# EAGLE board SparkFun_IoT_RedBoard-ESP32_v01-Panel (EAGLE 9.6.2), part 1 of 3
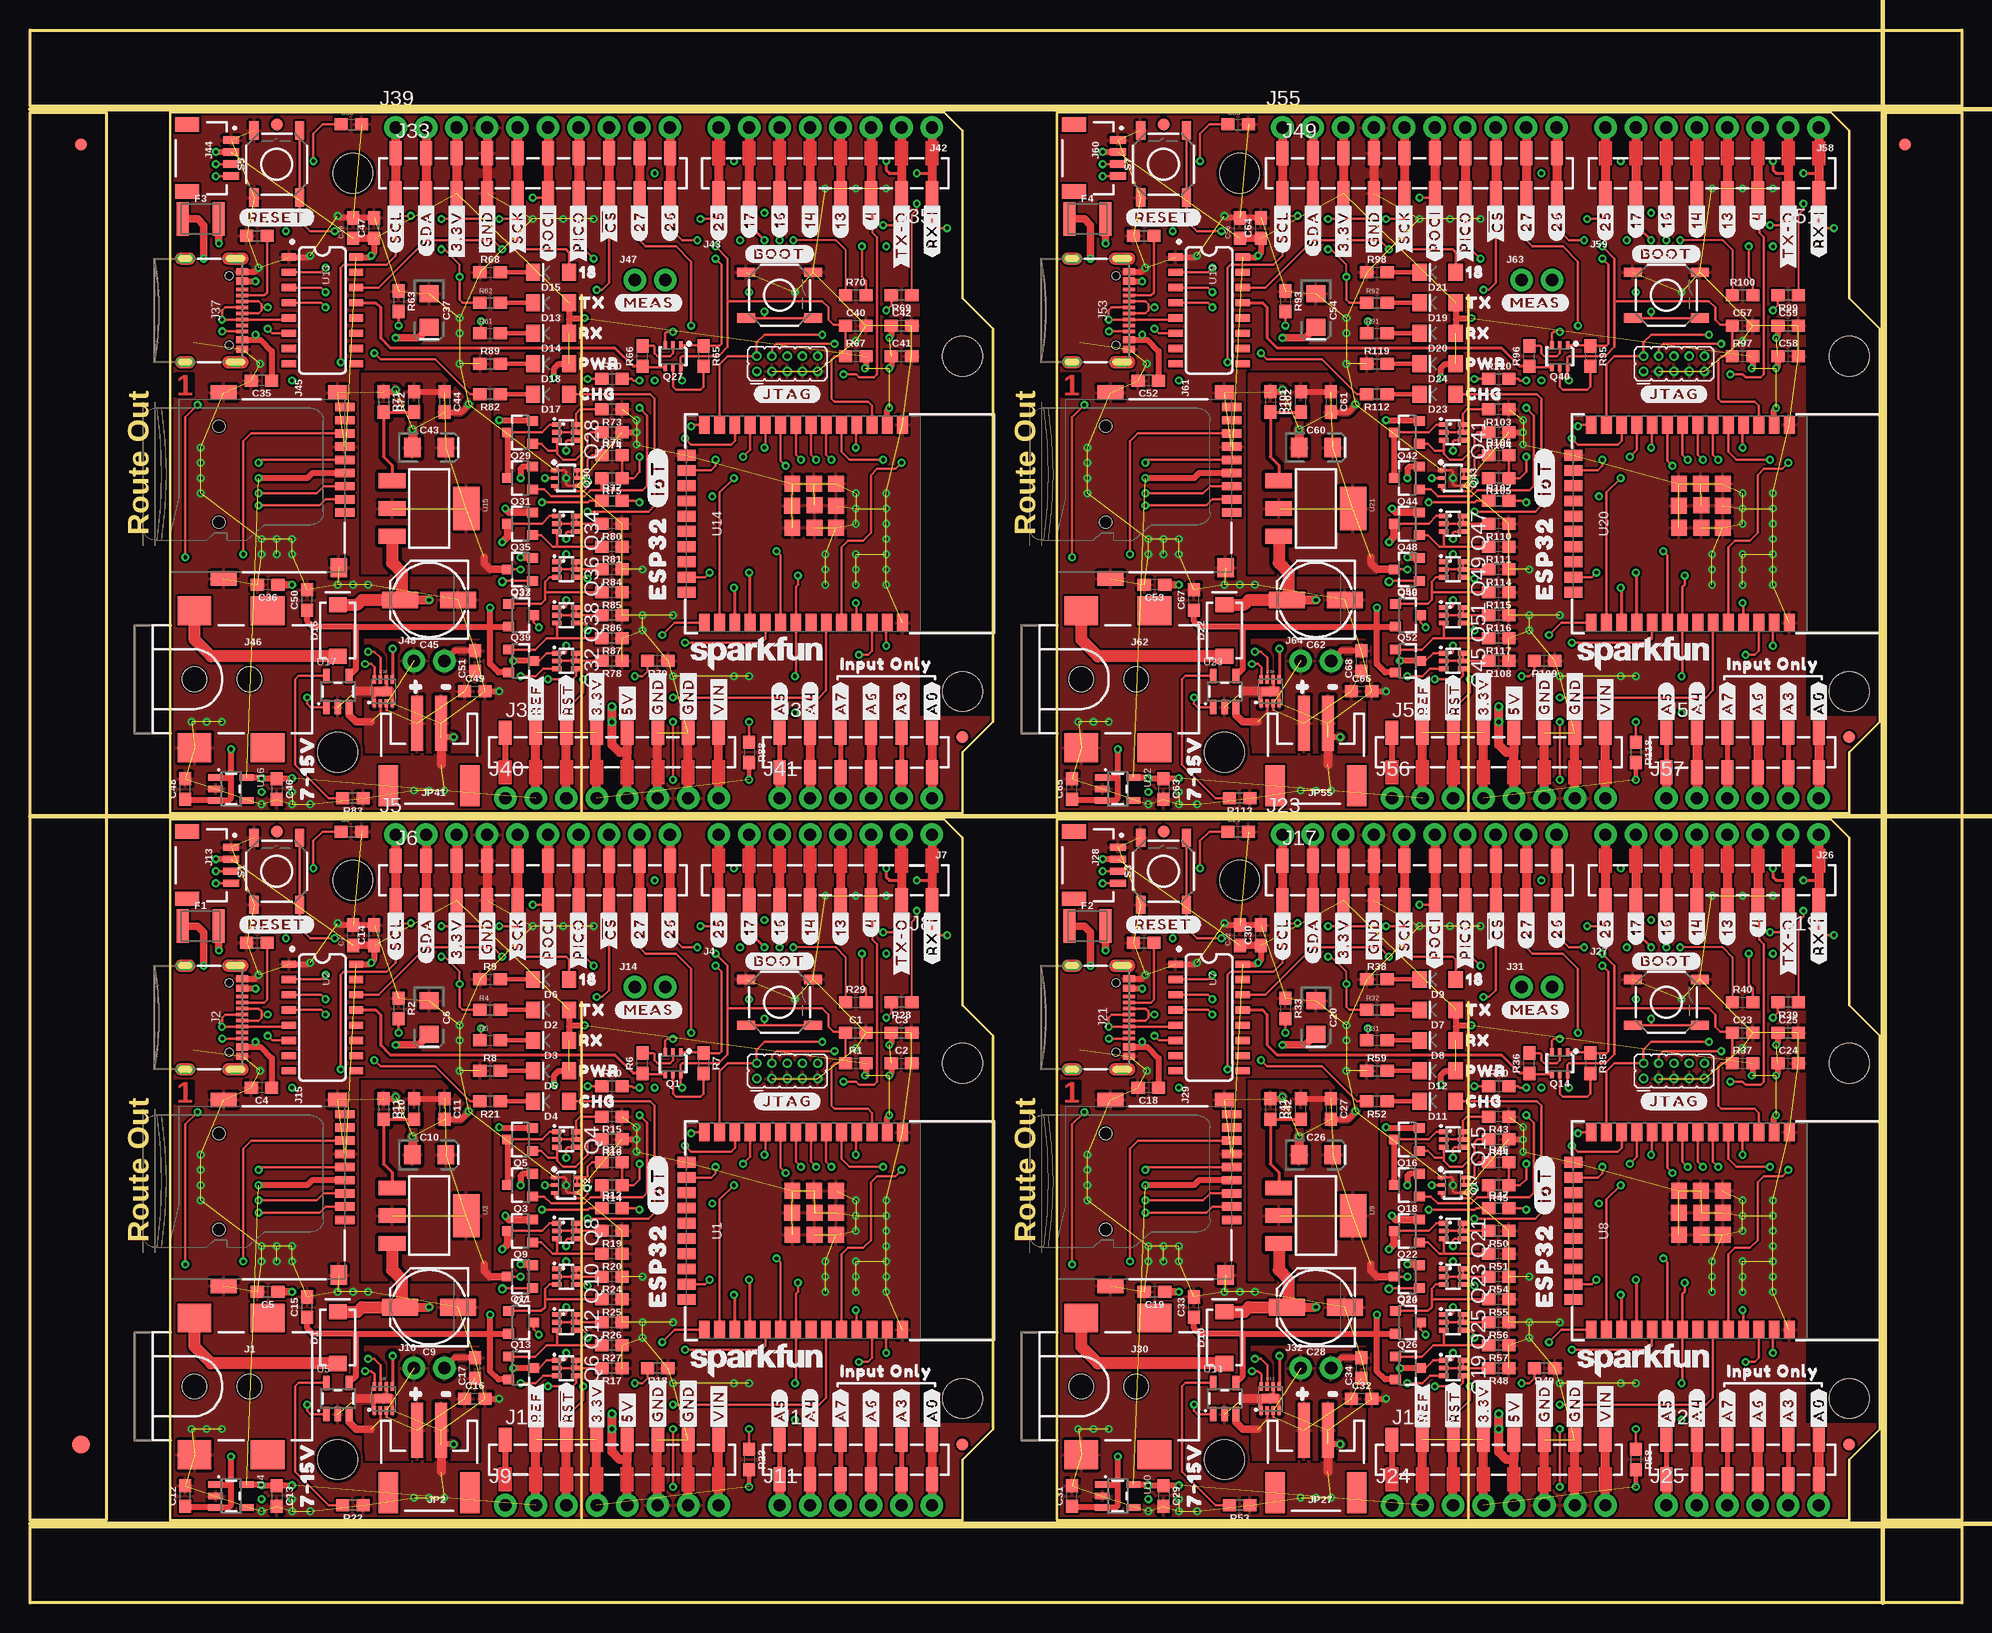
[diagram p0: board, top side]
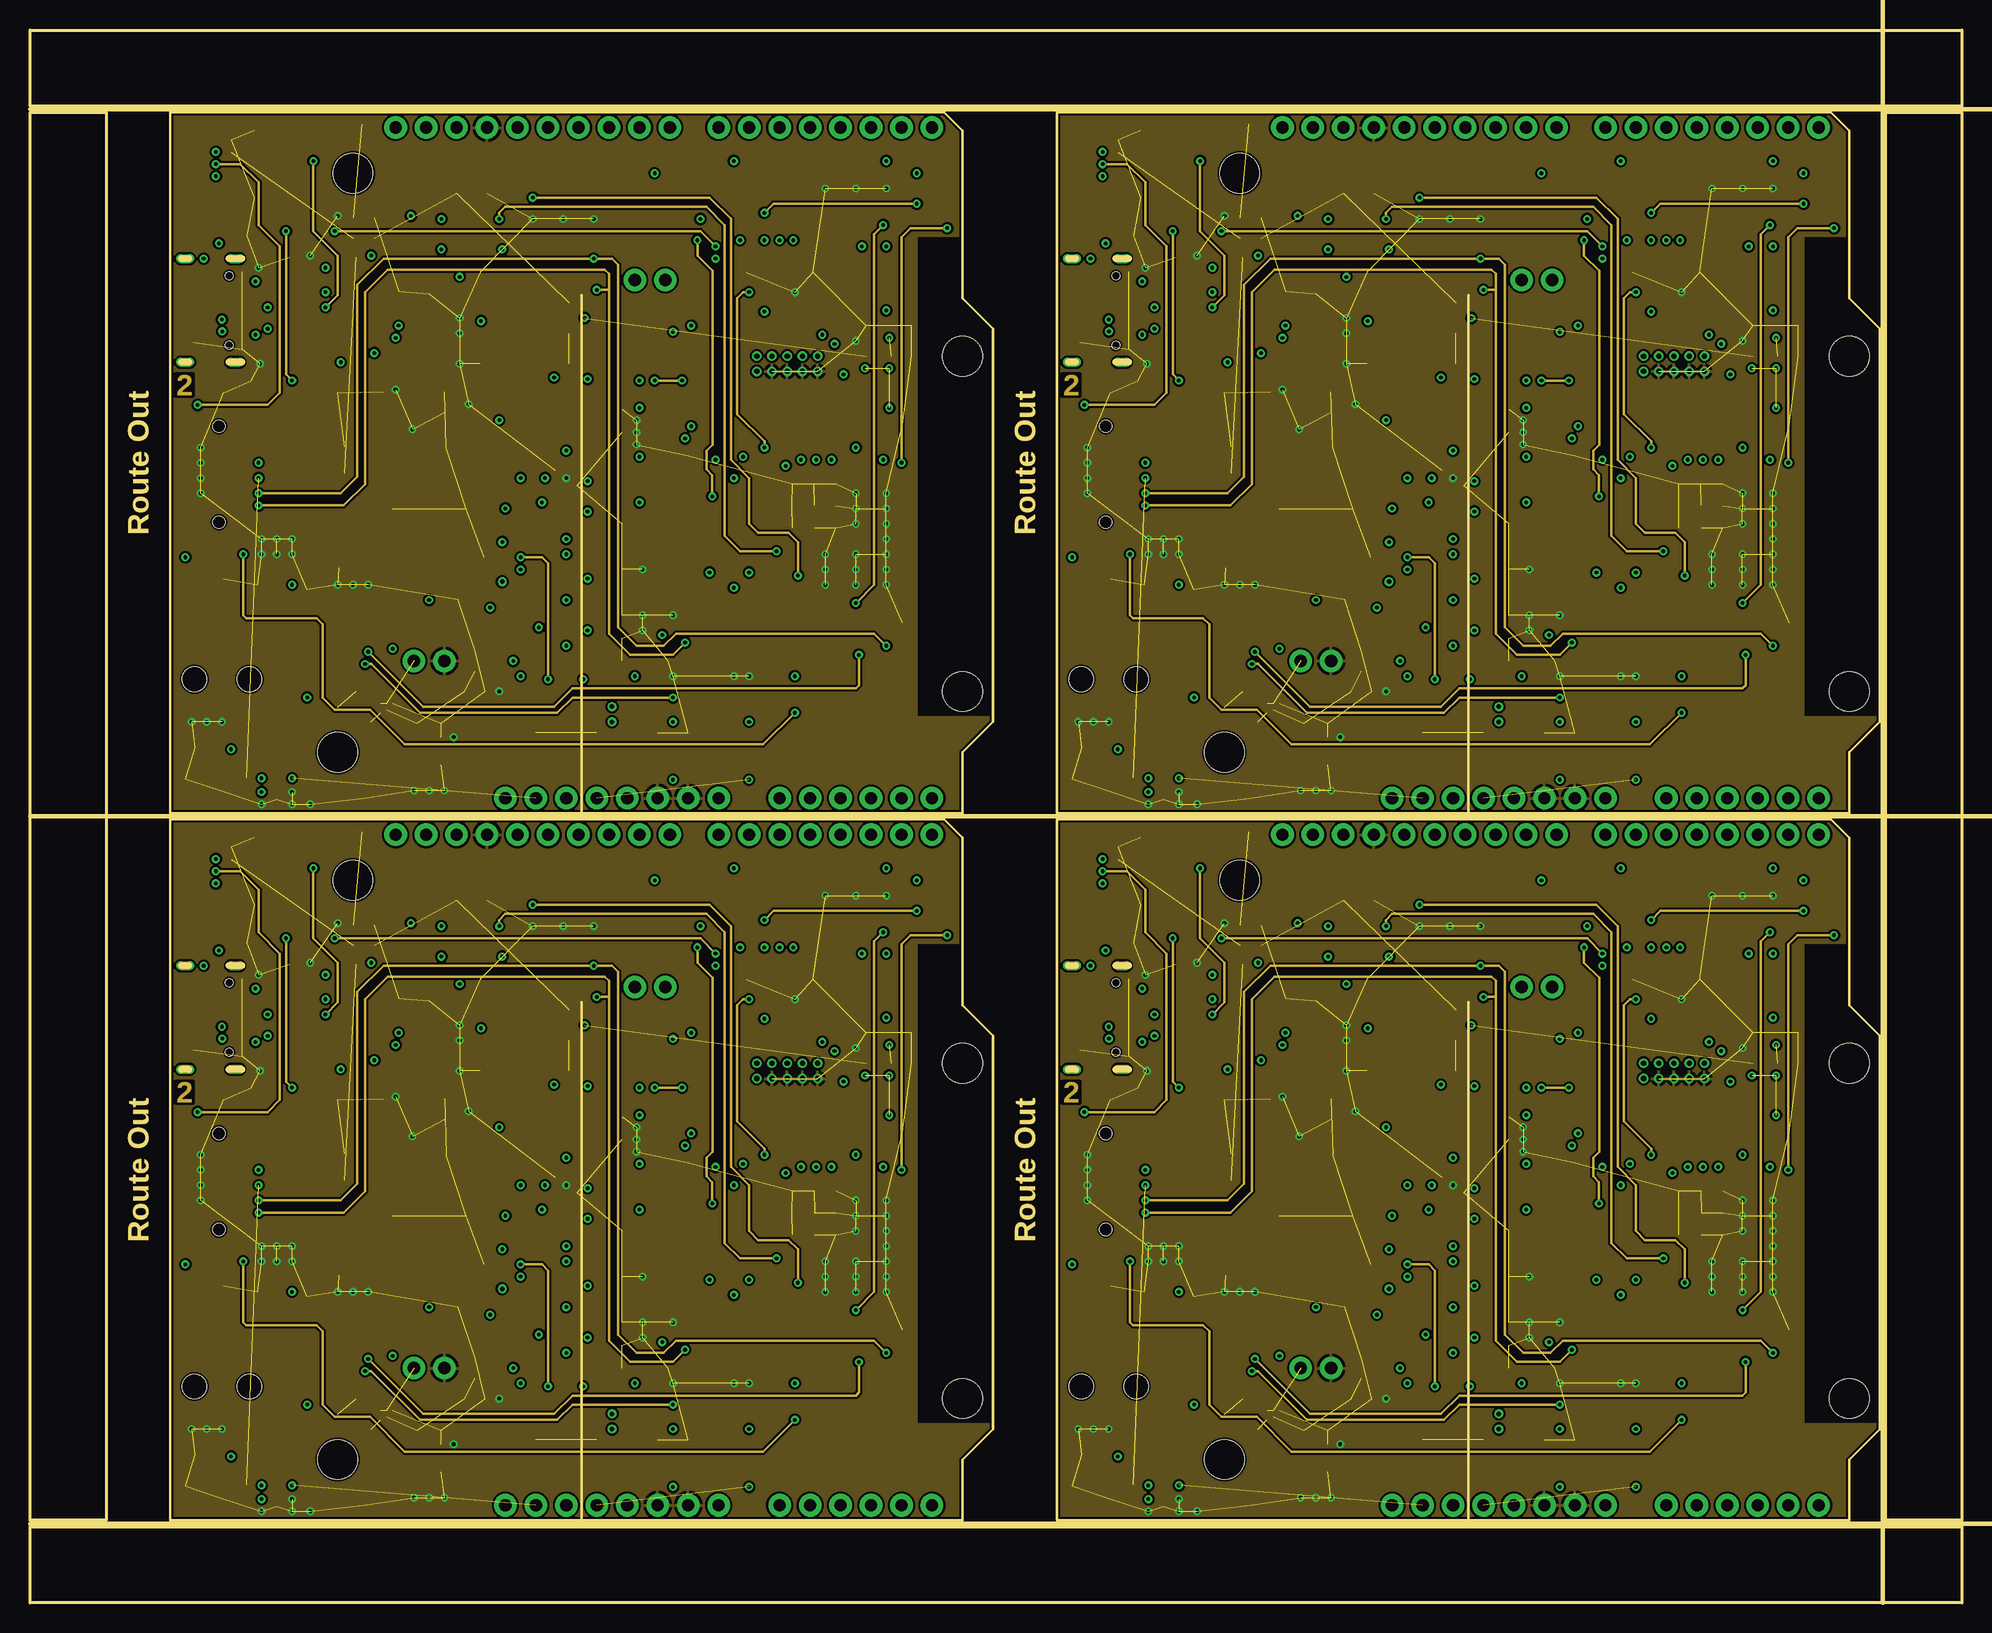
[diagram p1: board, inner layer Route2]
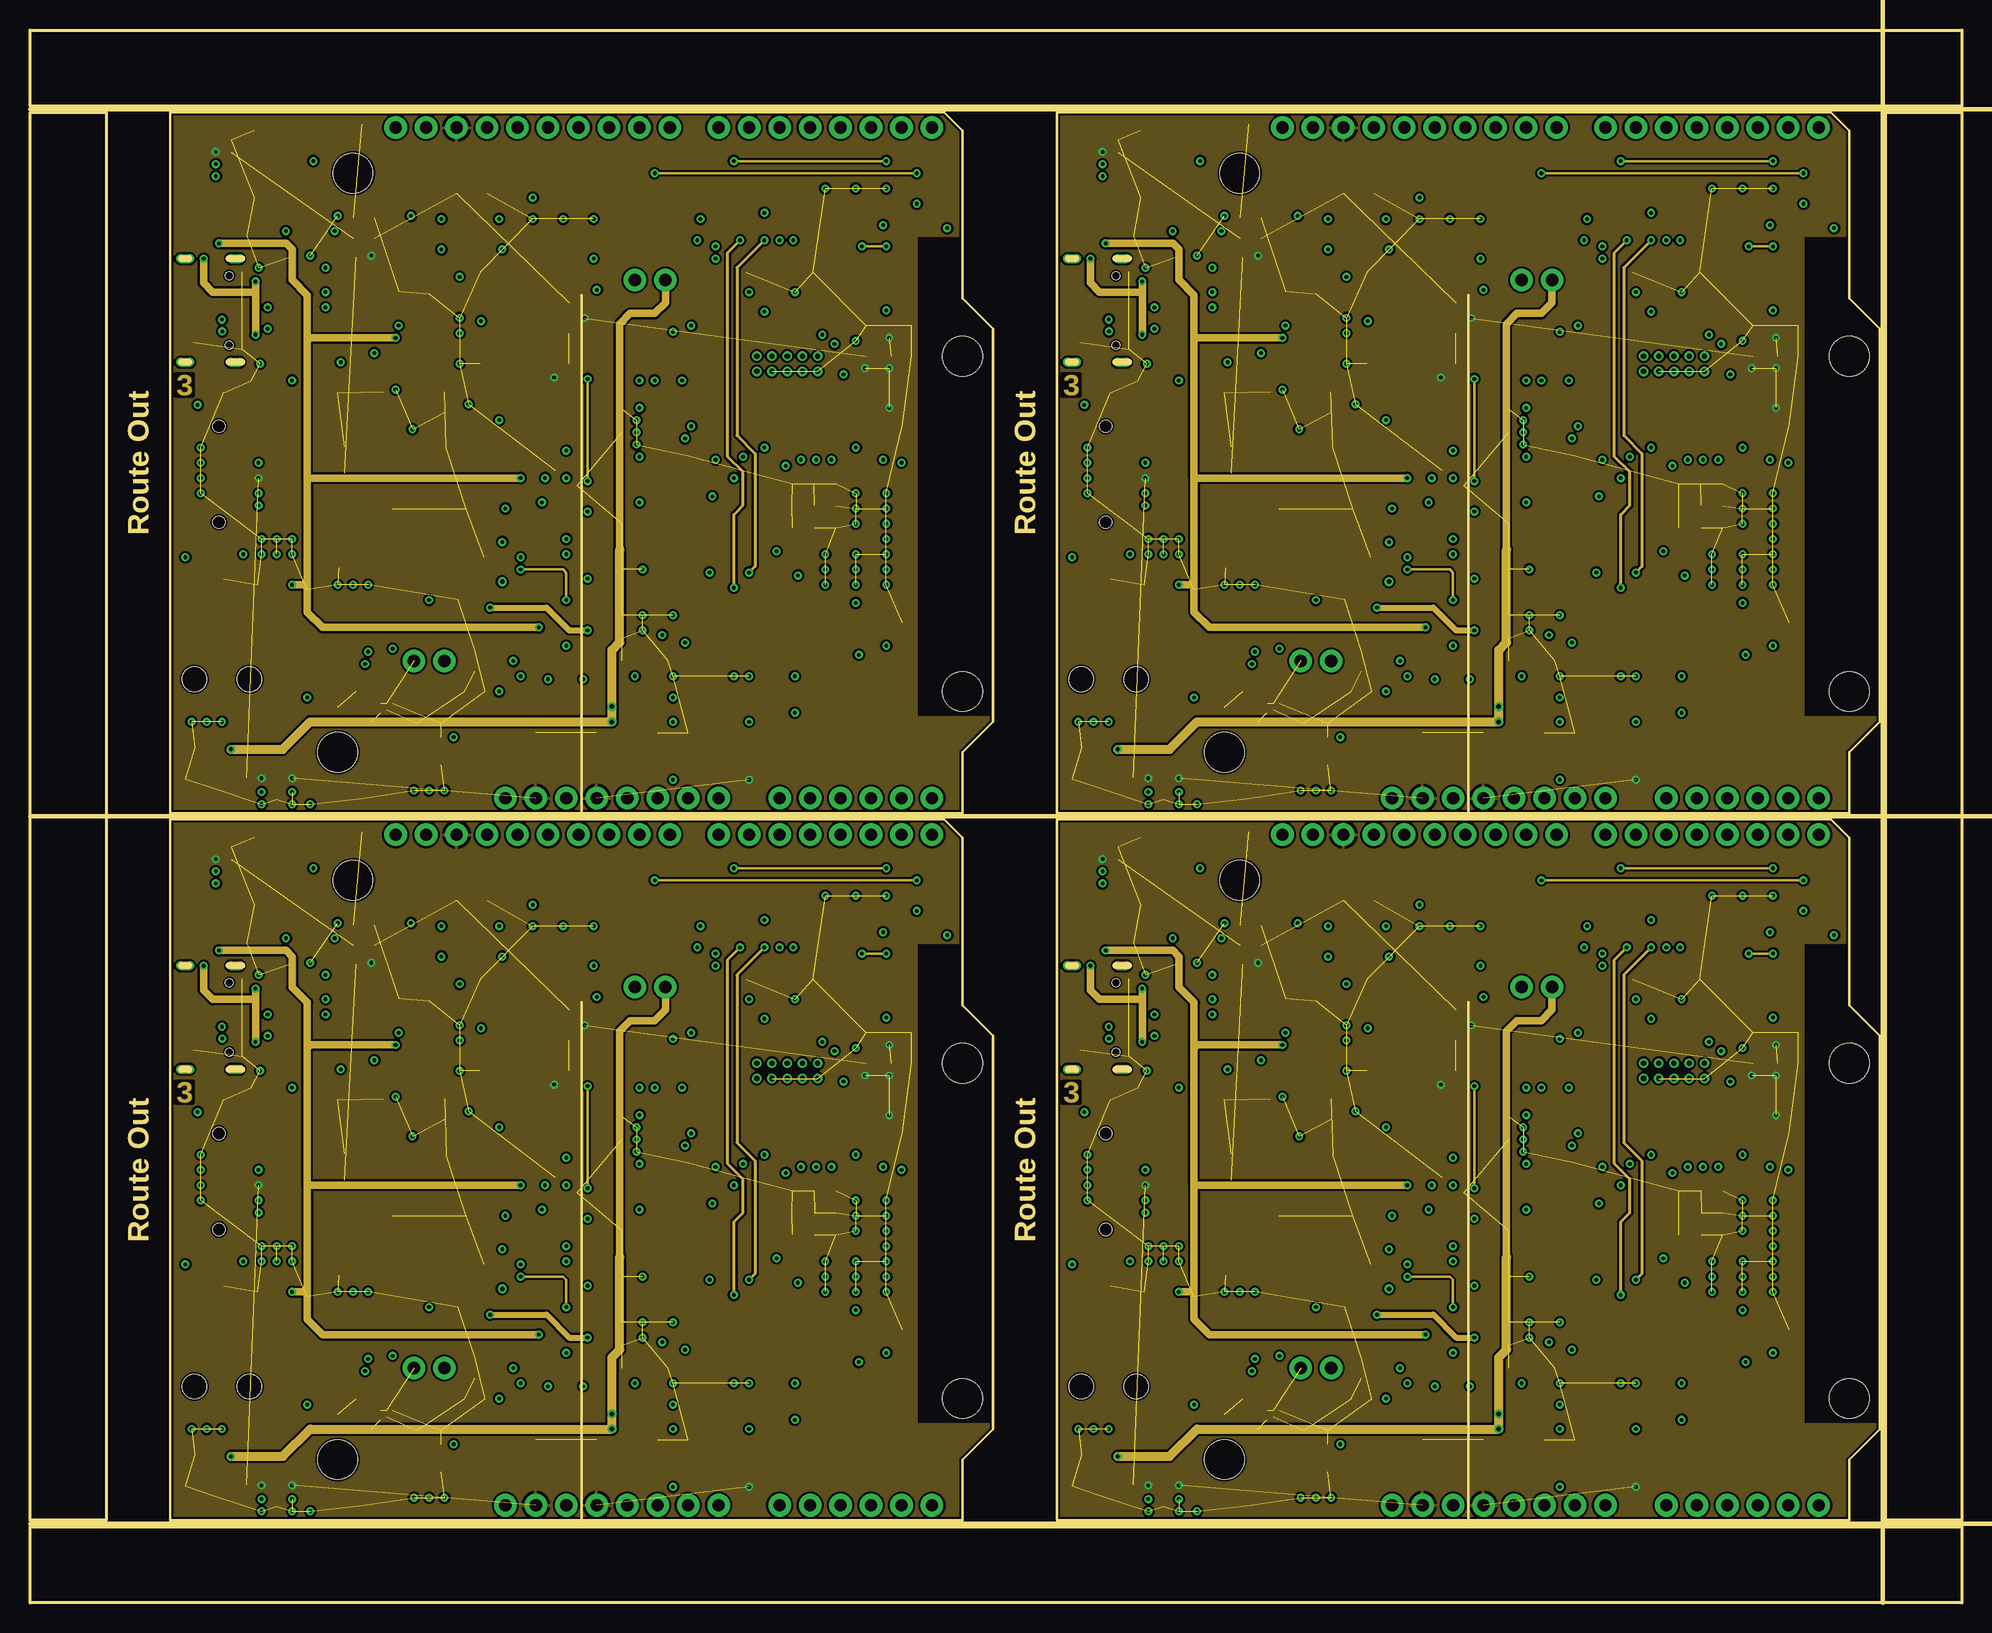
[diagram p2: board, inner layer Route15]
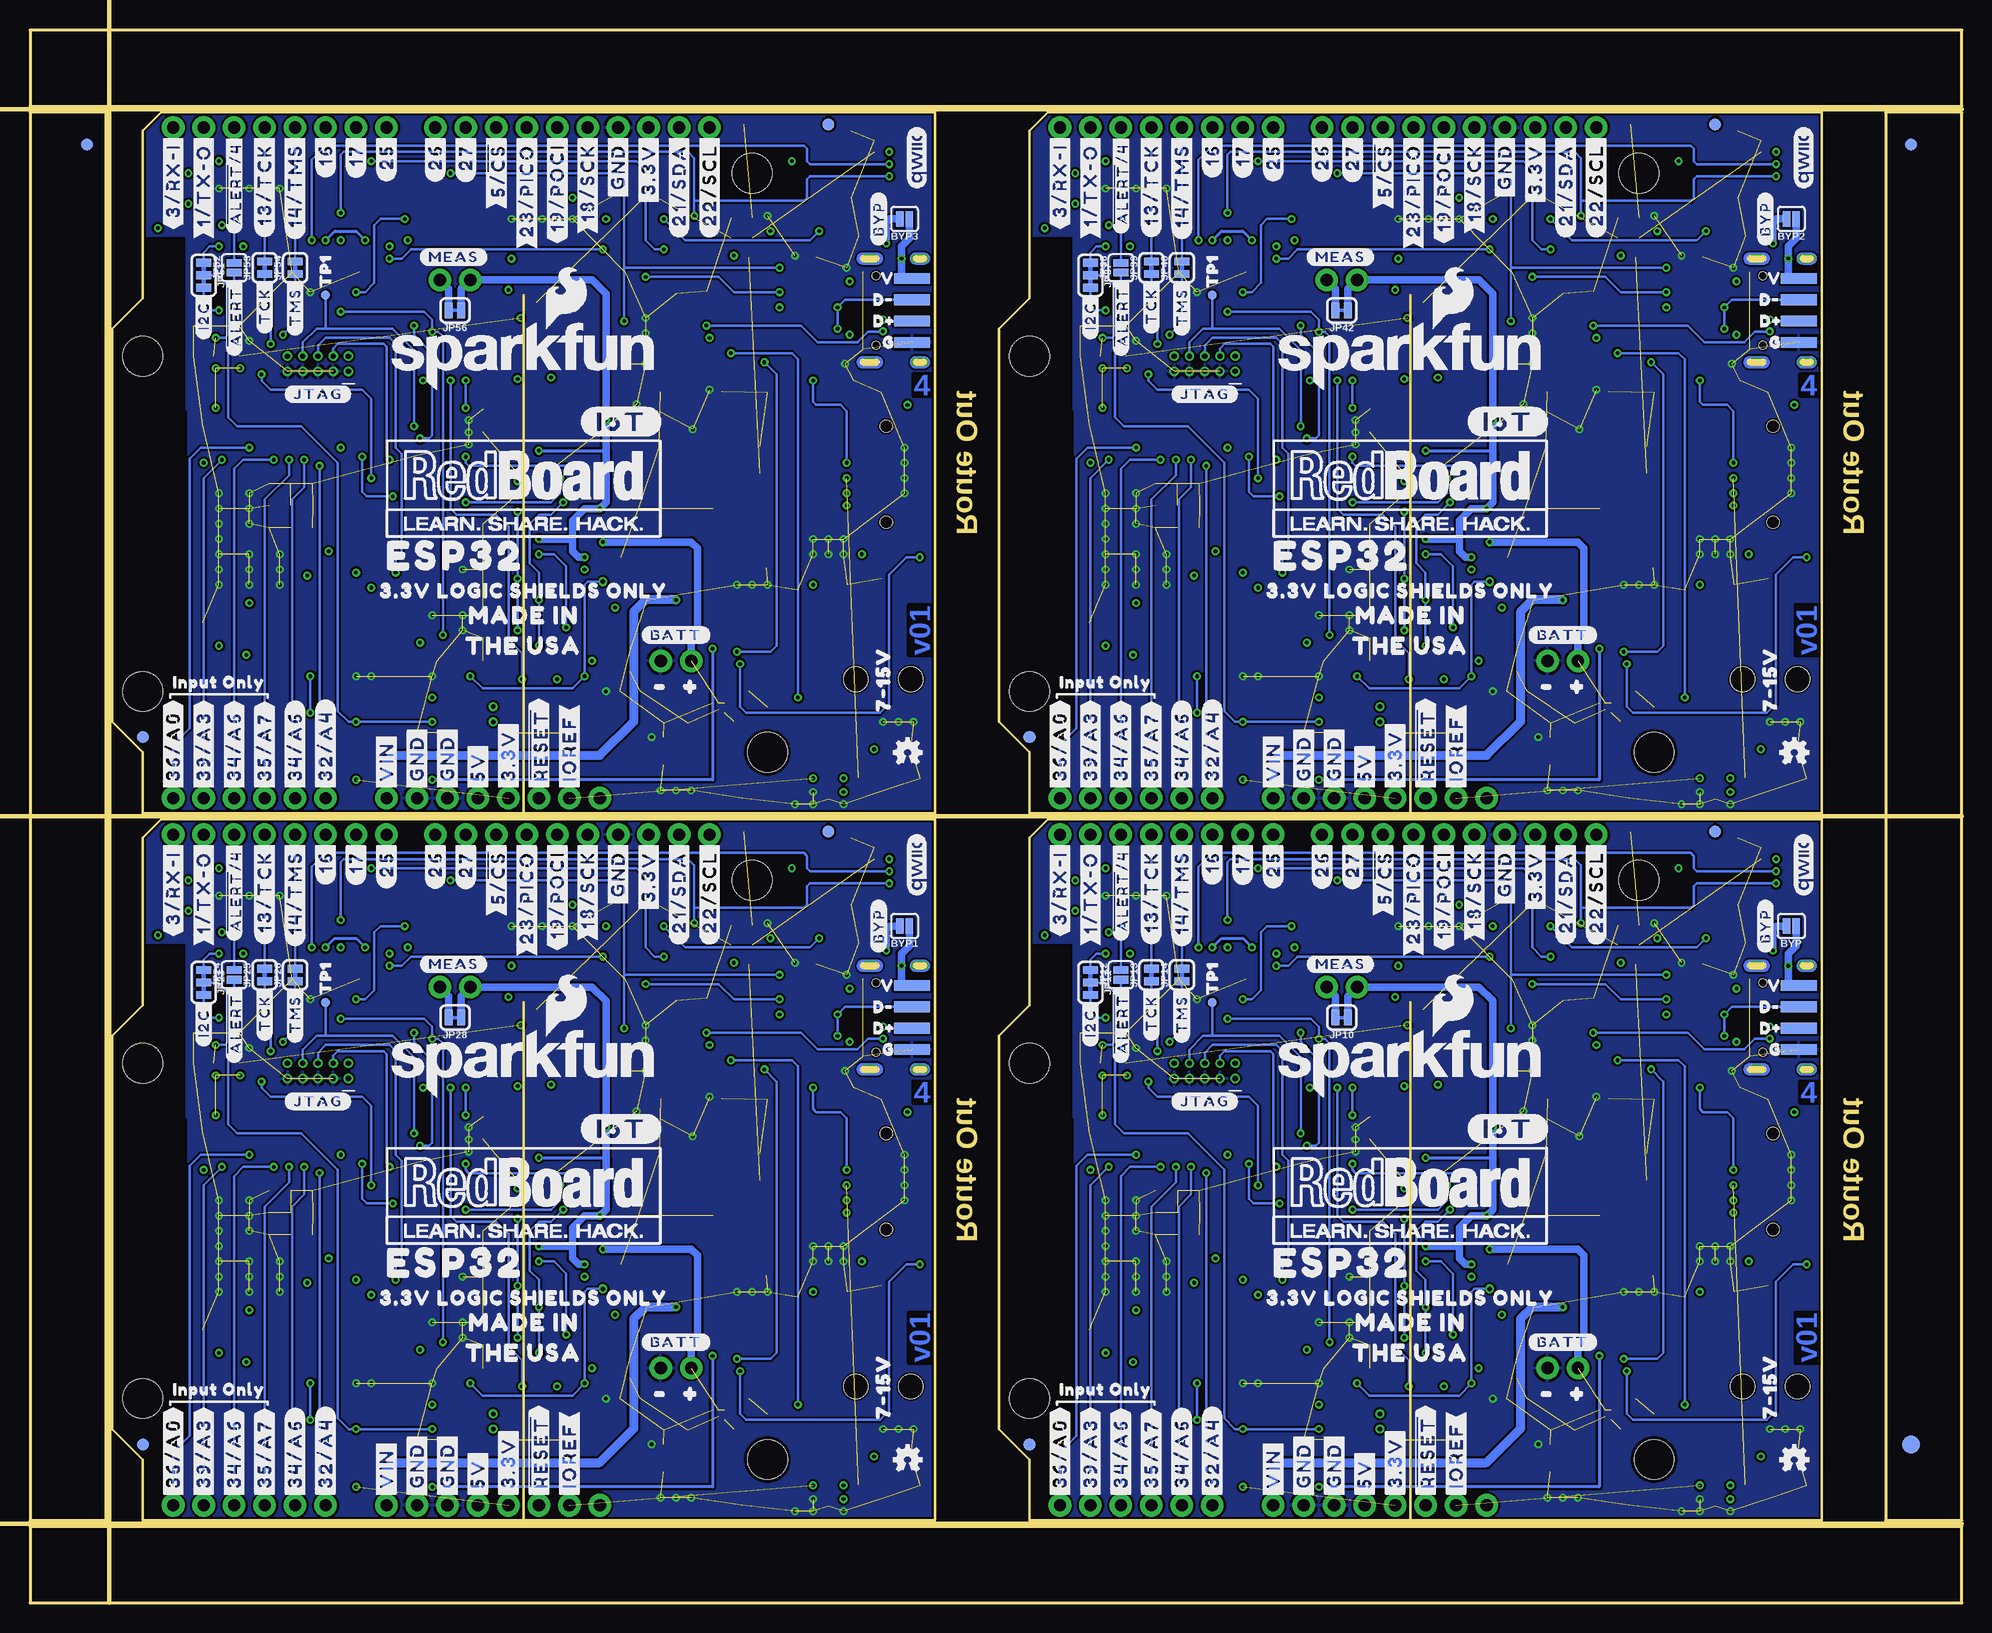
[diagram p3: board, bottom side, seen from below]

Size 161.04 x 131.06 mm. Coordinates in mm from the lower left corner, seen from the top.
Outline: 11.68,65.28 76.2,65.28 77.72,63.75 77.72,49.78 80.26,47.24 80.26,14.48 77.72,11.94 77.72,6.86 11.68,6.86 11.68,65.28
Outline: 85.6,65.28 150.11,65.28 151.64,63.75 151.64,49.78 154.18,47.24 154.18,14.48 151.64,11.94 151.64,6.86 85.6,6.86 85.6,65.28
Outline: 11.68,124.21 76.2,124.21 77.72,122.68 77.72,108.71 80.26,106.17 80.26,73.41 77.72,70.87 77.72,65.79 11.68,65.79 11.68,124.21
Outline: 85.6,124.21 150.11,124.21 151.64,122.68 151.64,108.71 154.18,106.17 154.18,73.41 151.64,70.87 151.64,65.79 85.6,65.79 85.6,124.21
Outline: 0,6.35 161.04,6.35 161.04,0 0,0 0,6.35
Outline: 154.69,124.21 161.04,124.21 161.04,6.86 154.69,6.86 154.69,124.21
Outline: 0,131.06 161.04,131.06 161.04,124.71 0,124.71 0,131.06
Outline: 0,124.21 6.35,124.21 6.35,6.86 0,6.86 0,124.21
Copper layers (1+2*15+16): Top 0.035559375mm / dielectric 0.47751875mm / Route2 0.035559375mm / dielectric 0.47751875mm / Route15 0.035559375mm / dielectric 0.47751875mm / Bottom 0.035559375mm
Design rules "SparkFun_IoT_RedBoard-ESP32_v01": minimum track width 7mil, minimum drill 12mil, track to track 7mil, track to pad 7mil, pad to pad 7mil, via to via 7mil, smd to smd 7mil, copper to edge 7mil, drill to drill 7mil, minimum pad ring 7mil, minimum via ring 7mil, stop-mask expansion 3mil, vias tented up to drill 25mil, thermal gap 10mil
tRestrict: area 74.2,15 to 80.3,54.9; area 148.1,15 to 154.2,54.9; area 74.2,73.9 to 80.3,113.8; area 148.1,73.9 to 154.2,113.8
bRestrict: area 74.2,21.8 to 80.3,40.1; area 74.2,15 to 80.3,54.9; area 148.1,21.8 to 154.2,40.1; area 148.1,15 to 154.2,54.9; area 74.2,80.8 to 80.3,99.1; area 74.2,73.9 to 80.3,113.8; area 148.1,80.8 to 154.2,99.1; area 148.1,73.9 to 154.2,113.8
vRestrict: area 12.3,29.2 to 13.7,37.5; area 17.4,30 to 19,37.5; area 59.6,17.7 to 60.2,18.2; area 62.1,17.5 to 62.6,18.4; area 23,36.2 to 24.4,38.5; area 11.9,19.8 to 21.1,31.9; area 86.2,29.2 to 87.6,37.5; area 91.3,30 to 93,37.5; area 133.5,17.7 to 134.1,18.2; area 136,17.5 to 136.5,18.4; area 96.9,36.2 to 98.3,38.5; area 85.9,19.8 to 95,31.9; 12 more areas
Milling: 12 lines

## Footprints (pad centres in the part's own frame; a part is rotated, then mirrored left to right if it is on the bottom)
SMT-JUMPER_2_NO_SILK = smd 0.635 x 1.27: 1 -0.406,0; 2 0.406,0
0603 = smd 1.1 x 1: 1 -0.85,0; 2 0.85,0
EIA3216 = smd 1.4 x 1.6: + 1.4,0; - -1.4,0
PANASONIC_D = smd 3 x 1.4: + 2.4,0; - -2.4,0
SMA-DIODE = smd 1.27 x 1.47: A -2.15,0; C 2.15,0
LED-1206-HIDDENSILK = smd 1.2 x 1.4: A -1.5,0; C 1.5,0
FIDUCIAL-1X2 = smd 1 x 1: 1 0,0
FIDUCIAL-1.5X3 = smd 1.5 x 1.5: 1 0,0
1210 = smd 1 x 2.8: 1 -1.5,0; 2 1.5,0
POWER_JACK_SMD = smd 2.8 x 2.4: GND 0,-5.7; P$4 6.1,-5.7; VIN0 0,5.7; VIN1 6.1,5.7 | hole 2.032: 0,0; 4.572,0
USB-C-16P-2LAYER-PADS = smd 0.3 x 1: A5 -1.25,-0.34; A6 -0.25,-0.34; A7 0.25,-0.34; A8 1.25,-0.34; B5 1.75,-0.34; B6 0.75,-0.34; B7 -0.75,-0.34; B8 -1.75,-0.34 | smd 0.6 x 1: GND -3.225,-0.34; GND2 3.225,-0.34; VBUS1 -2.45,-0.34; VBUS2 2.45,-0.34 | drill 0.4 pad 0.6 long: SHLD1 -4.318,-0.915; SHLD2 4.318,-0.915; SHLD3 -4.318,-5.095; SHLD4 4.318,-5.095 | hole 0.65: -2.89,-1.445; 2.89,-1.445
USB-SOLDER-PADS = smd 3 x 0.9: D+ 0,-0.889; D- 0,0.889; GND 0,-2.667; VBUS 0,2.667
2X5_PTH_SILK_.05 = drill 0.432: 1 0,0; 2 0,1.27; 3 1.27,0; 4 1.27,1.27; 5 2.54,0; 6 2.54,1.27; 7 3.81,0; 8 3.81,1.27; 9 5.08,0; 10 5.08,1.27
1X10_NO_SILK = drill 1.016 pad 1.88: 1 0,0; 2 2.54,0; 3 5.08,0; 4 7.62,0; 5 10.16,0; 6 12.7,0; 7 15.24,0; 8 17.78,0; 9 20.32,0; 10 22.86,0
1X10_SMD_COMBINED = smd 1 x 2: 1A 0,1.65; 1B 0,-1.65; 2A 2.54,1.65; 2B 2.54,-1.65; 3A 5.08,1.65; 3B 5.08,-1.65; 4A 7.62,1.65; 4B 7.62,-1.65; 5A 10.16,1.65; 5B 10.16,-1.65; 6A 12.7,1.65; 6B 12.7,-1.65; 7A 15.24,1.65; 7B 15.24,-1.65; 8A 17.78,1.65; 8B 17.78,-1.65; 9A 20.32,1.65; 9B 20.32,-1.65; 10A 22.86,1.65; 10B 22.86,-1.65
1X08_NO_SILK = drill 1.016 pad 1.88: 1 0,0; 2 2.54,0; 3 5.08,0; 4 7.62,0; 5 10.16,0; 6 12.7,0; 7 15.24,0; 8 17.78,0
1X08_SMD_COMBINED = smd 1 x 2: 1 0,1.65; 2 2.54,1.65; 3 5.08,1.65; 4 7.62,1.652; 5 10.16,1.65; 6 12.7,1.652; 7 15.24,1.65; 8 17.78,1.652
1X06_NO_SILK = drill 1.016 pad 1.88: 1 0,0; 2 2.54,0; 3 5.08,0; 4 7.62,0; 5 10.16,0; 6 12.7,0
1X06_SMD_STRAIGHT_COMBO = smd 1 x 2: 1 0,-1.65; 1-2 0,1.65; 2 2.54,1.65; 2-2 2.54,-1.65; 3 5.08,-1.65; 3-2 5.08,1.65; 4 7.62,1.65; 4-2 7.62,-1.65; 5 10.16,-1.65; 5-2 10.16,1.65; 6 12.7,1.65; 6-2 12.7,-1.65
JST04_1MM_RA = smd 0.6 x 1.35: 1 -1.5,0; 2 -0.5,0; 3 0.5,0; 4 1.5,0 | smd 1.2 x 2: NC1 2.8,-3.675; NC2 -2.8,-3.675
1X02_NO_SILK = drill 1.016 pad 1.88: 1 0,0; 2 2.54,0
MICROSD-EXTERNALPIN = smd 0.7 x 1.6: 1 2.25,10.5; 2 1.15,10.5; 3 0.05,10.5; 4 -1.05,10.5; 5 -2.15,10.5; 6 -3.25,10.5; 7 -4.35,10.5; 8 -5.45,10.5; 9 -6.55,10.5 | smd 1.2 x 1.6: 10 -7.75,9.9 | smd 1.2 x 2.2: 11 -7.75,0.4; 12 7.75,0.4 | smd 1.6 x 1.4: 13 6.85,10 | hole 1: 3.05,0; -4.95,0
JST-2-SMD = smd 1 x 4.6: 1 -1,-3.7; 2 1,-3.7 | smd 1.6 x 3.4: NC1 -3.4,1.5; NC2 3.4,1.5
STAND-OFF = hole 3.302: 0,0
SMT-JUMPER_2_NC_TRACE_SILK = smd 0.66 x 1.27: 1 -0.521,0; 2 0.521,0
SMT-JUMPER_3_2-NC_TRACE_SILK = smd 0.66 x 1.27: 1 -1.041,0; 2 0,0; 3 1.041,0
SC70-6 = smd 0.3 x 0.66: 1 -0.65,-0.92; 2 0,-0.92; 3 0.65,-0.92; 4 0.65,0.92; 5 0,0.92; 6 -0.65,0.92
SOT23-3 = smd 0.8 x 0.9: 1 -0.95,-1; 2 0.95,-1; 3 0,1.1
SOT363_PHILIPS = smd 0.4 x 0.8: 1 -0.65,-0.8; 2 0,-0.8; 3 0.65,-0.8; 4 0.65,0.8; 5 0,0.8; 6 -0.65,0.8
TACTILE_SWITCH_SMD_5.2MM = smd 1.524 x 0.762: 1 -2.794,1.905; 2 2.794,1.905; 3 -2.794,-1.905; 4 2.794,-1.905
PAD.03X.03 = smd 0.762 x 0.762: 1 0,0
ESP-WROOM-32D-NARROW = smd 0.9 x 1.5: 1 6.43,8.238; 2 5.16,8.238; 3 3.89,8.238; 4 2.62,8.238; 5 1.35,8.238; 6 0.08,8.238; 7 -1.19,8.238; 8 -2.46,8.238; 9 -3.73,8.238; 10 -5,8.238; 11 -6.27,8.238; 12 -7.54,8.238; 13 -8.81,8.238; 14 -10.08,8.238; 25 -10.08,-8.238; 26 -8.81,-8.238; 27 -7.54,-8.238; 28 -6.27,-8.238; 29 -5,-8.238; 30 -3.73,-8.238; 31 -2.46,-8.238; 32 -1.19,-8.238; 33 0.08,-8.238; 34 1.35,-8.238; 35 2.62,-8.238; 36 3.89,-8.238; 37 5.16,-8.238; 38 6.43,-8.238 | smd 1.5 x 0.9: 15 -11.57,5.715; 16 -11.57,4.445; 17 -11.57,3.175; 18 -11.57,1.905; 19 -11.57,0.635; 20 -11.57,-0.635; 21 -11.57,-1.905; 22 -11.57,-3.175; 23 -11.57,-4.445; 24 -11.57,-5.715 | smd 1.33 x 1.33: GND1 -0.912,1.531; GNDT1 -2.751,3.346; GNDT2 -2.761,1.516; GNDT3 -2.751,-0.314; GNDT4 -0.891,-0.324; GNDT5 0.909,-0.314; GNDT6 0.909,1.516; GNDT7 0.909,3.346; GNDT8 -0.921,3.346
SO016 = smd 0.6 x 1.2: 1 -4.445,-2.8; 2 -3.175,-2.8; 3 -1.905,-2.8; 4 -0.635,-2.8; 5 0.635,-2.8; 6 1.905,-2.8; 7 3.175,-2.8; 8 4.445,-2.8; 9 4.445,2.8; 10 3.175,2.8; 11 1.905,2.8; 12 0.635,2.8; 13 -0.635,2.8; 14 -1.905,2.8; 15 -3.175,2.8; 16 -4.445,2.8
SOT223 = smd 1.219 x 2.235: 1 -2.311,-3.099; 2 0,-3.099; 3 2.311,-3.099 | smd 3.6 x 2.2: 4 0,3.099
SOT23-5 = smd 0.55 x 1.2: 1 -0.95,-1.3; 2 0,-1.3; 3 0.95,-1.3; 4 0.95,1.3; 5 -0.95,1.3
DFN-8 = smd 0.3 x 0.7: 1 -0.75,-0.99; 2 -0.25,-0.99; 3 0.25,-0.99; 4 0.75,-0.99; 5 0.75,0.99; 6 0.25,0.99; 7 -0.25,0.99; 8 -0.75,0.99 | smd 1.38 x 0.8: 9 0,0

## Placement (x,y rotation side)
BYP  JUMPER-SMT_2_NO_SILK  [SMT-JUMPER_2_NO_SILK]  14.22,56.39 180 bottom
BYP1  JUMPER-SMT_2_NO_SILK  [SMT-JUMPER_2_NO_SILK]  88.14,56.39 180 bottom
BYP2  JUMPER-SMT_2_NO_SILK  [SMT-JUMPER_2_NO_SILK]  14.22,115.32 180 bottom
BYP3  JUMPER-SMT_2_NO_SILK  [SMT-JUMPER_2_NO_SILK]  88.14,115.32 180 bottom
C1  0.1uF  [0603]  68.83,47.5 0 top
C2  0.1uF  [0603]  72.64,44.96 0 top
C3  10uF  [0603]  72.64,47.5 0 top
C4  0.1uF  [0603]  19.3,42.93 180 top
C5  0.1uF  [0603]  19.81,25.91 180 top
C6  10uF  [EIA3216]  33.27,48.77 270 top
C7  0.1uF  [0603]  26.92,55.63 90 top
C8  10nF  [0603]  26.8,64.26 0 top
C9  47uF  [PANASONIC_D]  33.27,24.64 180 top
C10  10uF  [EIA3216]  33.27,37.34 0 top
C11  0.1uF  [0603]  34.54,41.15 270 top
C12  0.1uF  [0603]  12.95,8.89 90 top
C13  0.1uF  [0603]  20.57,8.89 270 top
C14  10uF  [0603]  28.7,55.63 90 top
C15  4.7uF  [0603]  23.11,24.64 90 top
C16  4.7uF  [0603]  37.08,17.02 0 top
C17  0.1uF  [0603]  37.08,19.56 90 top
C18  0.1uF  [0603]  93.22,42.93 180 top
C19  0.1uF  [0603]  93.73,25.91 180 top
C20  10uF  [EIA3216]  107.19,48.77 270 top
C21  10nF  [0603]  100.71,64.26 0 top
C22  0.1uF  [0603]  100.84,55.63 90 top
C23  0.1uF  [0603]  142.75,47.5 0 top
C24  0.1uF  [0603]  146.56,44.96 0 top
C25  10uF  [0603]  146.56,47.5 0 top
C26  10uF  [EIA3216]  107.19,37.34 0 top
C27  0.1uF  [0603]  108.46,41.15 270 top
C28  47uF  [PANASONIC_D]  107.19,24.64 180 top
C29  0.1uF  [0603]  94.49,8.89 270 top
C30  10uF  [0603]  102.62,55.63 90 top
C31  0.1uF  [0603]  86.87,8.89 90 top
C32  4.7uF  [0603]  111,17.02 0 top
C33  4.7uF  [0603]  97.03,24.64 90 top
C34  0.1uF  [0603]  111,19.56 90 top
C35  0.1uF  [0603]  19.3,101.85 180 top
C36  0.1uF  [0603]  19.81,84.84 180 top
C37  10uF  [EIA3216]  33.27,107.7 270 top
C38  10nF  [0603]  26.8,123.19 0 top
C39  0.1uF  [0603]  26.92,114.55 90 top
C40  0.1uF  [0603]  68.83,106.43 0 top
C41  0.1uF  [0603]  72.64,103.89 0 top
C42  10uF  [0603]  72.64,106.43 0 top
C43  10uF  [EIA3216]  33.27,96.27 0 top
C44  0.1uF  [0603]  34.54,100.08 270 top
C45  47uF  [PANASONIC_D]  33.27,83.57 180 top
C46  0.1uF  [0603]  20.57,67.82 270 top
C47  10uF  [0603]  28.7,114.55 90 top
C48  0.1uF  [0603]  12.95,67.82 90 top
C49  4.7uF  [0603]  37.08,75.95 0 top
C50  4.7uF  [0603]  23.11,83.57 90 top
C51  0.1uF  [0603]  37.08,78.49 90 top
C52  0.1uF  [0603]  93.22,101.85 180 top
C53  0.1uF  [0603]  93.73,84.84 180 top
C54  10uF  [EIA3216]  107.19,107.7 270 top
C55  10nF  [0603]  100.71,123.19 0 top
C56  0.1uF  [0603]  100.84,114.55 90 top
C57  0.1uF  [0603]  142.75,106.43 0 top
C58  0.1uF  [0603]  146.56,103.89 0 top
C59  10uF  [0603]  146.56,106.43 0 top
C60  10uF  [EIA3216]  107.19,96.27 0 top
C61  0.1uF  [0603]  108.46,100.08 270 top
C62  47uF  [PANASONIC_D]  107.19,83.57 180 top
C63  0.1uF  [0603]  94.49,67.82 270 top
C64  10uF  [0603]  102.62,114.55 90 top
C65  0.1uF  [0603]  86.87,67.82 90 top
C66  4.7uF  [0603]  111,75.95 0 top
C67  4.7uF  [0603]  97.03,83.57 90 top
C68  0.1uF  [0603]  111,78.49 90 top
D1  1A/40V/500mV  [SMA-DIODE]  25.65,22.1 90 top
D2  GREEN  [LED-1206-HIDDENSILK]  43.43,49.4 180 top
D3  YELLOW  [LED-1206-HIDDENSILK]  43.43,46.86 180 top
D4  RED  [LED-1206-HIDDENSILK]  43.43,41.78 180 top
D5  PWR  [LED-1206-HIDDENSILK]  43.43,44.32 180 top
D6  BLUE  [LED-1206-HIDDENSILK]  43.43,51.94 180 top
D7  GREEN  [LED-1206-HIDDENSILK]  117.35,49.4 180 top
D8  YELLOW  [LED-1206-HIDDENSILK]  117.35,46.86 180 top
D9  BLUE  [LED-1206-HIDDENSILK]  117.35,51.94 180 top
D10  1A/40V/500mV  [SMA-DIODE]  99.57,22.1 90 top
D11  RED  [LED-1206-HIDDENSILK]  117.35,41.78 180 top
D12  PWR  [LED-1206-HIDDENSILK]  117.35,44.32 180 top
D13  GREEN  [LED-1206-HIDDENSILK]  43.43,108.33 180 top
D14  YELLOW  [LED-1206-HIDDENSILK]  43.43,105.79 180 top
D15  BLUE  [LED-1206-HIDDENSILK]  43.43,110.87 180 top
D16  1A/40V/500mV  [SMA-DIODE]  25.65,81.03 90 top
D17  RED  [LED-1206-HIDDENSILK]  43.43,100.71 180 top
D18  PWR  [LED-1206-HIDDENSILK]  43.43,103.25 180 top
D19  GREEN  [LED-1206-HIDDENSILK]  117.35,108.33 180 top
D20  YELLOW  [LED-1206-HIDDENSILK]  117.35,105.79 180 top
D21  BLUE  [LED-1206-HIDDENSILK]  117.35,110.87 180 top
D22  1A/40V/500mV  [SMA-DIODE]  99.57,81.03 90 top
D23  RED  [LED-1206-HIDDENSILK]  117.35,100.71 180 top
D24  PWR  [LED-1206-HIDDENSILK]  117.35,103.25 180 top
E$1  [FIDUCIAL-1X2]  4.23,121.54 0 top
E$2  [FIDUCIAL-1X2]  4.23,121.54 0 bottom
E$3  [FIDUCIAL-1X2]  156.29,121.54 0 top
E$4  [FIDUCIAL-1X2]  156.29,121.54 0 bottom
E$5  [FIDUCIAL-1.5X3]  4.23,13.21 0 top
E$6  [FIDUCIAL-1.5X3]  4.23,13.21 0 bottom
F1  6V/2A  [1210]  14.22,56.39 0 top
F2  6V/2A  [1210]  88.14,56.39 0 top
F3  6V/2A  [1210]  14.22,115.32 0 top
F4  6V/2A  [1210]  88.14,115.32 0 top
J1  5.5x2.1mm Barrel  [POWER_JACK_SMD]  13.72,18.03 0 top
J2  USB C  [USB-C-16P-2LAYER-PADS]  18.03,48.77 270 top
J3  USB_SOLDER_PADS  [USB-SOLDER-PADS]  13.59,48.77 0 bottom
J4  [2X5_PTH_SILK_.05]  60.58,43.69 0 top
J5  M10NO_SILK  [1X10_NO_SILK]  30.48,64.01 0 top
J6  [1X10_SMD_COMBINED]  30.48,60.2 0 top
J7  [1X08_NO_SILK]  75.18,64.01 180 top
J8  [1X08_SMD_COMBINED]  75.18,60.2 180 top
J9  [1X08_NO_SILK]  39.62,8.13 0 top
J10  [1X08_SMD_COMBINED]  39.62,11.94 0 top
J11  [1X06_NO_SILK]  62.48,8.13 0 top
J12  [1X06_SMD_STRAIGHT_COMBO]  62.48,11.94 0 top
J13  QWIIC_RIGHT_ANGLE  [JST04_1MM_RA]  16.76,61.47 270 top
J14  [1X02_NO_SILK]  50.42,51.31 0 top
J15  MICRO-SD-PUSH-PUSH-EXT-PIN  [MICROSD-EXTERNALPIN]  15.75,34.16 270 top
J16  [1X02_NO_SILK]  32,19.56 0 top
J17  [1X10_SMD_COMBINED]  104.39,60.2 0 top
J18  [1X08_SMD_COMBINED]  113.54,11.94 0 top
J19  [1X08_SMD_COMBINED]  149.1,60.2 180 top
J20  [1X06_SMD_STRAIGHT_COMBO]  136.4,11.94 0 top
J21  USB C  [USB-C-16P-2LAYER-PADS]  91.95,48.77 270 top
J22  USB_SOLDER_PADS  [USB-SOLDER-PADS]  87.5,48.77 0 bottom
J23  M10NO_SILK  [1X10_NO_SILK]  104.39,64.01 0 top
J24  [1X08_NO_SILK]  113.54,8.13 0 top
J25  [1X06_NO_SILK]  136.4,8.13 0 top
J26  [1X08_NO_SILK]  149.1,64.01 180 top
J27  [2X5_PTH_SILK_.05]  134.49,43.69 0 top
J28  QWIIC_RIGHT_ANGLE  [JST04_1MM_RA]  90.68,61.47 270 top
J29  MICRO-SD-PUSH-PUSH-EXT-PIN  [MICROSD-EXTERNALPIN]  89.66,34.16 270 top
J30  5.5x2.1mm Barrel  [POWER_JACK_SMD]  87.63,18.03 0 top
J31  [1X02_NO_SILK]  124.33,51.31 0 top
J32  [1X02_NO_SILK]  105.92,19.56 0 top
J33  [1X10_SMD_COMBINED]  30.48,119.13 0 top
J34  [1X08_SMD_COMBINED]  39.62,70.87 0 top
J35  [1X08_SMD_COMBINED]  75.18,119.13 180 top
J36  [1X06_SMD_STRAIGHT_COMBO]  62.48,70.87 0 top
J37  USB C  [USB-C-16P-2LAYER-PADS]  18.03,107.7 270 top
J38  USB_SOLDER_PADS  [USB-SOLDER-PADS]  13.59,107.7 0 bottom
J39  M10NO_SILK  [1X10_NO_SILK]  30.48,122.94 0 top
J40  [1X08_NO_SILK]  39.62,67.06 0 top
J41  [1X06_NO_SILK]  62.48,67.06 0 top
J42  [1X08_NO_SILK]  75.18,122.94 180 top
J43  [2X5_PTH_SILK_.05]  60.58,102.62 0 top
J44  QWIIC_RIGHT_ANGLE  [JST04_1MM_RA]  16.76,120.4 270 top
J45  MICRO-SD-PUSH-PUSH-EXT-PIN  [MICROSD-EXTERNALPIN]  15.75,93.09 270 top
J46  5.5x2.1mm Barrel  [POWER_JACK_SMD]  13.72,76.96 0 top
J47  [1X02_NO_SILK]  50.42,110.24 0 top
J48  [1X02_NO_SILK]  32,78.49 0 top
J49  [1X10_SMD_COMBINED]  104.39,119.13 0 top
J50  [1X08_SMD_COMBINED]  113.54,70.87 0 top
J51  [1X08_SMD_COMBINED]  149.1,119.13 180 top
J52  [1X06_SMD_STRAIGHT_COMBO]  136.4,70.87 0 top
J53  USB C  [USB-C-16P-2LAYER-PADS]  91.95,107.7 270 top
J54  USB_SOLDER_PADS  [USB-SOLDER-PADS]  87.5,107.7 0 bottom
J55  M10NO_SILK  [1X10_NO_SILK]  104.39,122.94 0 top
J56  [1X08_NO_SILK]  113.54,67.06 0 top
J57  [1X06_NO_SILK]  136.4,67.06 0 top
J58  [1X08_NO_SILK]  149.1,122.94 180 top
J59  [2X5_PTH_SILK_.05]  134.49,102.62 0 top
J60  QWIIC_RIGHT_ANGLE  [JST04_1MM_RA]  90.68,120.4 270 top
J61  MICRO-SD-PUSH-PUSH-EXT-PIN  [MICROSD-EXTERNALPIN]  89.66,93.09 270 top
J62  5.5x2.1mm Barrel  [POWER_JACK_SMD]  87.63,76.96 0 top
J63  [1X02_NO_SILK]  124.33,110.24 0 top
J64  [1X02_NO_SILK]  105.92,78.49 0 top
JP1  FIDUCIAL1X2  [FIDUCIAL-1X2]  77.72,13.21 0 top
JP2  LiPo  [JST-2-SMD]  33.27,10.67 180 top
JP3  STAND-OFF  [STAND-OFF]  25.65,11.94 0 top
JP4  STAND-OFF  [STAND-OFF]  77.72,17.02 0 top
JP5  STAND-OFF  [STAND-OFF]  77.72,44.96 0 top
JP6  STAND-OFF  [STAND-OFF]  26.92,60.2 0 top
JP7  FIDUCIAL1X2  [FIDUCIAL-1X2]  20.57,64.26 0 bottom
JP8  FIDUCIAL1X2  [FIDUCIAL-1X2]  77.72,13.21 0 bottom
JP9  FIDUCIAL1X2  [FIDUCIAL-1X2]  20.57,64.26 0 top
JP10  JUMPER-SMT_2_NC_TRACE_SILK  [SMT-JUMPER_2_NC_TRACE_SILK]  51.69,48.77 180 bottom
JP11  JUMPER-SMT_3_2-NC_TRACE_SILK  [SMT-JUMPER_3_2-NC_TRACE_SILK]  72.64,51.69 270 bottom
JP12  JUMPER-SMT_2_NO_SILK  [SMT-JUMPER_2_NO_SILK]  70.1,52.32 90 bottom
JP13  JUMPER-SMT_2_NC_TRACE_SILK  [SMT-JUMPER_2_NC_TRACE_SILK]  67.56,52.32 90 bottom
JP14  JUMPER-SMT_2_NC_TRACE_SILK  [SMT-JUMPER_2_NC_TRACE_SILK]  65.02,52.32 90 bottom
JP15  STAND-OFF  [STAND-OFF]  99.57,11.94 0 top
JP16  STAND-OFF  [STAND-OFF]  151.64,17.02 0 top
JP17  STAND-OFF  [STAND-OFF]  151.64,44.96 0 top
JP18  STAND-OFF  [STAND-OFF]  100.84,60.2 0 top
JP19  FIDUCIAL1X2  [FIDUCIAL-1X2]  94.49,64.26 0 bottom
JP20  FIDUCIAL1X2  [FIDUCIAL-1X2]  151.64,13.21 0 top
JP21  FIDUCIAL1X2  [FIDUCIAL-1X2]  151.64,13.21 0 bottom
JP22  FIDUCIAL1X2  [FIDUCIAL-1X2]  94.49,64.26 0 top
JP23  JUMPER-SMT_3_2-NC_TRACE_SILK  [SMT-JUMPER_3_2-NC_TRACE_SILK]  146.56,51.69 270 bottom
JP24  JUMPER-SMT_2_NO_SILK  [SMT-JUMPER_2_NO_SILK]  144.02,52.32 90 bottom
JP25  JUMPER-SMT_2_NC_TRACE_SILK  [SMT-JUMPER_2_NC_TRACE_SILK]  141.48,52.32 90 bottom
JP26  JUMPER-SMT_2_NC_TRACE_SILK  [SMT-JUMPER_2_NC_TRACE_SILK]  138.94,52.32 90 bottom
JP27  LiPo  [JST-2-SMD]  107.19,10.67 180 top
JP28  JUMPER-SMT_2_NC_TRACE_SILK  [SMT-JUMPER_2_NC_TRACE_SILK]  125.6,48.77 180 bottom
JP29  STAND-OFF  [STAND-OFF]  25.65,70.87 0 top
JP30  STAND-OFF  [STAND-OFF]  77.72,75.95 0 top
JP31  STAND-OFF  [STAND-OFF]  77.72,103.89 0 top
JP32  STAND-OFF  [STAND-OFF]  26.92,119.13 0 top
JP33  FIDUCIAL1X2  [FIDUCIAL-1X2]  20.57,123.19 0 bottom
JP34  FIDUCIAL1X2  [FIDUCIAL-1X2]  77.72,72.14 0 top
JP35  FIDUCIAL1X2  [FIDUCIAL-1X2]  77.72,72.14 0 bottom
JP36  FIDUCIAL1X2  [FIDUCIAL-1X2]  20.57,123.19 0 top
JP37  JUMPER-SMT_3_2-NC_TRACE_SILK  [SMT-JUMPER_3_2-NC_TRACE_SILK]  72.64,110.62 270 bottom
JP38  JUMPER-SMT_2_NO_SILK  [SMT-JUMPER_2_NO_SILK]  70.1,111.25 90 bottom
JP39  JUMPER-SMT_2_NC_TRACE_SILK  [SMT-JUMPER_2_NC_TRACE_SILK]  67.56,111.25 90 bottom
JP40  JUMPER-SMT_2_NC_TRACE_SILK  [SMT-JUMPER_2_NC_TRACE_SILK]  65.02,111.25 90 bottom
JP41  LiPo  [JST-2-SMD]  33.27,69.6 180 top
JP42  JUMPER-SMT_2_NC_TRACE_SILK  [SMT-JUMPER_2_NC_TRACE_SILK]  51.69,107.7 180 bottom
JP43  STAND-OFF  [STAND-OFF]  99.57,70.87 0 top
JP44  STAND-OFF  [STAND-OFF]  151.64,75.95 0 top
JP45  STAND-OFF  [STAND-OFF]  151.64,103.89 0 top
JP46  STAND-OFF  [STAND-OFF]  100.84,119.13 0 top
JP47  FIDUCIAL1X2  [FIDUCIAL-1X2]  94.49,123.19 0 bottom
JP48  FIDUCIAL1X2  [FIDUCIAL-1X2]  151.64,72.14 0 top
JP49  FIDUCIAL1X2  [FIDUCIAL-1X2]  151.64,72.14 0 bottom
JP50  FIDUCIAL1X2  [FIDUCIAL-1X2]  94.49,123.19 0 top
JP51  JUMPER-SMT_3_2-NC_TRACE_SILK  [SMT-JUMPER_3_2-NC_TRACE_SILK]  146.56,110.62 270 bottom
JP52  JUMPER-SMT_2_NO_SILK  [SMT-JUMPER_2_NO_SILK]  144.02,111.25 90 bottom
JP53  JUMPER-SMT_2_NC_TRACE_SILK  [SMT-JUMPER_2_NC_TRACE_SILK]  141.48,111.25 90 bottom
JP54  JUMPER-SMT_2_NC_TRACE_SILK  [SMT-JUMPER_2_NC_TRACE_SILK]  138.94,111.25 90 bottom
JP55  LiPo  [JST-2-SMD]  107.19,69.6 180 top
JP56  JUMPER-SMT_2_NC_TRACE_SILK  [SMT-JUMPER_2_NC_TRACE_SILK]  125.6,107.7 180 bottom
LOGO1  SFE_LOGO_NAME.1_INCH  [SFE_LOGO_NAME_.1]  60.58,20.19 0 top
LOGO2  QWIIC_LOGO_5MM  [QWIIC_5MM]  13.21,61.47 90 bottom
LOGO3  OSHW-LOGOMINI  [OSHW-LOGO-MINI]  13.97,11.94 0 bottom
LOGO4  SFE_LOGO_NAME.1_INCH  [SFE_LOGO_NAME_.1]  134.49,20.19 0 top
LOGO5  QWIIC_LOGO_5MM  [QWIIC_5MM]  87.12,61.47 90 bottom
LOGO6  SFE_LOGO_NAME_FLAME.2_INCH  [SFE_LOGO_NAME_FLAME_.2]  45.97,44.96 0 bottom
LOGO7  OSHW-LOGOMINI  [OSHW-LOGO-MINI]  87.88,11.94 0 bottom
LOGO8  SFE_LOGO_NAME_FLAME.2_INCH  [SFE_LOGO_NAME_FLAME_.2]  119.89,44.96 0 bottom
LOGO9  SFE_LOGO_NAME.1_INCH  [SFE_LOGO_NAME_.1]  60.58,79.12 0 top
LOGO10  QWIIC_LOGO_5MM  [QWIIC_5MM]  13.21,120.4 90 bottom
LOGO11  OSHW-LOGOMINI  [OSHW-LOGO-MINI]  13.97,70.87 0 bottom
LOGO12  SFE_LOGO_NAME_FLAME.2_INCH  [SFE_LOGO_NAME_FLAME_.2]  45.97,103.89 0 bottom
LOGO13  SFE_LOGO_NAME.1_INCH  [SFE_LOGO_NAME_.1]  134.49,79.12 0 top
LOGO14  QWIIC_LOGO_5MM  [QWIIC_5MM]  87.12,120.4 90 bottom
LOGO15  OSHW-LOGOMINI  [OSHW-LOGO-MINI]  87.88,70.87 0 bottom
LOGO16  SFE_LOGO_NAME_FLAME.2_INCH  [SFE_LOGO_NAME_FLAME_.2]  119.89,103.89 0 bottom
Q1  MBT3904DW1T1  [SC70-6]  53.59,44.96 180 top
Q2  [SC70-6]  44.7,34.8 270 top
Q3  20V/4.2A/52mΩ/1.4W  [SOT23-3]  40.89,34.8 90 top
Q4  [SOT363_PHILIPS]  44.7,38.61 270 top
Q5  20V/4.2A/52mΩ/1.4W  [SOT23-3]  40.89,38.61 90 top
Q6  [SOT363_PHILIPS]  44.7,19.56 270 top
Q7  20V/4.2A/52mΩ/1.4W  [SOT23-3]  40.89,27.18 90 top
Q8  [SOT363_PHILIPS]  44.7,30.99 270 top
Q9  20V/4.2A/52mΩ/1.4W  [SOT23-3]  40.89,30.99 90 top
Q10  [SOT363_PHILIPS]  44.7,27.18 270 top
Q11  20V/4.2A/52mΩ/1.4W  [SOT23-3]  40.89,23.37 270 top
Q12  [SOT363_PHILIPS]  44.7,23.37 270 top
Q13  20V/4.2A/52mΩ/1.4W  [SOT23-3]  40.89,19.56 270 top
Q14  MBT3904DW1T1  [SC70-6]  127.51,44.96 180 top
Q15  [SOT363_PHILIPS]  118.62,38.61 270 top
Q16  20V/4.2A/52mΩ/1.4W  [SOT23-3]  114.81,38.61 90 top
Q17  [SC70-6]  118.62,34.8 270 top
Q18  20V/4.2A/52mΩ/1.4W  [SOT23-3]  114.81,34.8 90 top
Q19  [SOT363_PHILIPS]  118.62,19.56 270 top
Q20  20V/4.2A/52mΩ/1.4W  [SOT23-3]  114.81,27.18 90 top
Q21  [SOT363_PHILIPS]  118.62,30.99 270 top
Q22  20V/4.2A/52mΩ/1.4W  [SOT23-3]  114.81,30.99 90 top
Q23  [SOT363_PHILIPS]  118.62,27.18 270 top
Q24  20V/4.2A/52mΩ/1.4W  [SOT23-3]  114.81,23.37 270 top
Q25  [SOT363_PHILIPS]  118.62,23.37 270 top
Q26  20V/4.2A/52mΩ/1.4W  [SOT23-3]  114.81,19.56 270 top
Q27  MBT3904DW1T1  [SC70-6]  53.59,103.89 180 top
Q28  [SOT363_PHILIPS]  44.7,97.54 270 top
Q29  20V/4.2A/52mΩ/1.4W  [SOT23-3]  40.89,97.54 90 top
Q30  [SC70-6]  44.7,93.73 270 top
Q31  20V/4.2A/52mΩ/1.4W  [SOT23-3]  40.89,93.73 90 top
Q32  [SOT363_PHILIPS]  44.7,78.49 270 top
Q33  20V/4.2A/52mΩ/1.4W  [SOT23-3]  40.89,86.11 90 top
Q34  [SOT363_PHILIPS]  44.7,89.92 270 top
Q35  20V/4.2A/52mΩ/1.4W  [SOT23-3]  40.89,89.92 90 top
Q36  [SOT363_PHILIPS]  44.7,86.11 270 top
Q37  20V/4.2A/52mΩ/1.4W  [SOT23-3]  40.89,82.3 270 top
Q38  [SOT363_PHILIPS]  44.7,82.3 270 top
Q39  20V/4.2A/52mΩ/1.4W  [SOT23-3]  40.89,78.49 270 top
Q40  MBT3904DW1T1  [SC70-6]  127.51,103.89 180 top
Q41  [SOT363_PHILIPS]  118.62,97.54 270 top
Q42  20V/4.2A/52mΩ/1.4W  [SOT23-3]  114.81,97.54 90 top
Q43  [SC70-6]  118.62,93.73 270 top
Q44  20V/4.2A/52mΩ/1.4W  [SOT23-3]  114.81,93.73 90 top
Q45  [SOT363_PHILIPS]  118.62,78.49 270 top
Q46  20V/4.2A/52mΩ/1.4W  [SOT23-3]  114.81,86.11 90 top
Q47  [SOT363_PHILIPS]  118.62,89.92 270 top
Q48  20V/4.2A/52mΩ/1.4W  [SOT23-3]  114.81,89.92 90 top
Q49  [SOT363_PHILIPS]  118.62,86.11 270 top
Q50  20V/4.2A/52mΩ/1.4W  [SOT23-3]  114.81,82.3 270 top
Q51  [SOT363_PHILIPS]  118.62,82.3 270 top
Q52  20V/4.2A/52mΩ/1.4W  [SOT23-3]  114.81,78.49 270 top
R1  10k  [0603]  68.83,44.96 0 top
R2  5.1k  [0603]  30.73,49.53 270 top
R3  5.1k  [0603]  18.92,54.99 0 top
R4  4.7k  [0603]  38.35,49.4 0 top
R5  4.7k  [0603]  38.35,46.86 0 top
R6  10k  [0603]  51.05,44.96 90 top
R7  10k  [0603]  56.13,44.96 270 top
R8  10k  [0603]  38.35,44.32 0 top
R9  4.7k  [0603]  38.35,51.94 0 top
R10  240  [0603]  32,41.15 90 top
R11  715  [0603]  29.46,41.15 270 top
R12  10k  [0603]  48.51,32.89 0 top
R13  10k  [0603]  48.51,36.7 0 top
R14  10k  [0603]  48.51,34.8 180 top
R15  10k  [0603]  48.51,40.51 180 top
R16  47k  [0603]  48.51,38.61 180 top
R17  10k  [0603]  48.51,19.56 180 top
R18  47k  [0603]  52.32,19.56 180 top
R19  10k  [0603]  48.51,30.99 180 top
R20  47k  [0603]  48.51,29.08 180 top
R21  1k  [0603]  38.35,41.78 180 top
R22  2.0k  [0603]  26.92,8.13 180 top
R23  10k  [0603]  59.94,11.94 270 top
R24  10k  [0603]  48.51,27.18 180 top
R25  47k  [0603]  48.51,25.27 180 top
R26  10k  [0603]  48.51,23.37 180 top
R27  47k  [0603]  48.51,21.46 180 top
R28  2.2k  [0603]  72.64,50.04 180 top
R29  2.2k  [0603]  68.83,50.04 0 top
R30  100  [0603]  48.51,43.05 0 top
R31  4.7k  [0603]  112.27,46.86 0 top
R32  4.7k  [0603]  112.27,49.4 0 top
R33  5.1k  [0603]  104.65,49.53 270 top
R34  5.1k  [0603]  92.84,54.99 0 top
R35  10k  [0603]  130.05,44.96 270 top
R36  10k  [0603]  124.97,44.96 90 top
R37  10k  [0603]  142.75,44.96 0 top
R38  4.7k  [0603]  112.27,51.94 0 top
R39  2.2k  [0603]  146.56,50.04 180 top
R40  2.2k  [0603]  142.75,50.04 0 top
R41  715  [0603]  103.38,41.15 270 top
R42  240  [0603]  105.92,41.15 90 top
R43  10k  [0603]  122.43,40.51 180 top
R44  47k  [0603]  122.43,38.61 180 top
R45  10k  [0603]  122.43,34.8 180 top
R46  10k  [0603]  122.43,36.7 0 top
R47  10k  [0603]  122.43,32.89 0 top
R48  10k  [0603]  122.43,19.56 180 top
R49  47k  [0603]  126.24,19.56 180 top
R50  10k  [0603]  122.43,30.99 180 top
R51  47k  [0603]  122.43,29.08 180 top
R52  1k  [0603]  112.27,41.78 180 top
R53  2.0k  [0603]  100.84,8.13 180 top
R54  10k  [0603]  122.43,27.18 180 top
R55  47k  [0603]  122.43,25.27 180 top
R56  10k  [0603]  122.43,23.37 180 top
R57  47k  [0603]  122.43,21.46 180 top
R58  10k  [0603]  133.86,11.94 270 top
R59  10k  [0603]  112.27,44.32 0 top
R60  100  [0603]  122.43,43.05 0 top
R61  4.7k  [0603]  38.35,105.79 0 top
R62  4.7k  [0603]  38.35,108.33 0 top
R63  5.1k  [0603]  30.73,108.46 270 top
R64  5.1k  [0603]  18.92,113.92 0 top
R65  10k  [0603]  56.13,103.89 270 top
R66  10k  [0603]  51.05,103.89 90 top
R67  10k  [0603]  68.83,103.89 0 top
R68  4.7k  [0603]  38.35,110.87 0 top
R69  2.2k  [0603]  72.64,108.97 180 top
R70  2.2k  [0603]  68.83,108.97 0 top
R71  715  [0603]  29.46,100.08 270 top
R72  240  [0603]  32,100.08 90 top
R73  10k  [0603]  48.51,99.44 180 top
R74  47k  [0603]  48.51,97.54 180 top
R75  10k  [0603]  48.51,93.73 180 top
R76  10k  [0603]  48.51,95.63 0 top
R77  10k  [0603]  48.51,91.82 0 top
R78  10k  [0603]  48.51,78.49 180 top
R79  47k  [0603]  52.32,78.49 180 top
R80  10k  [0603]  48.51,89.92 180 top
R81  47k  [0603]  48.51,88.01 180 top
R82  1k  [0603]  38.35,100.71 180 top
R83  2.0k  [0603]  26.92,67.06 180 top
R84  10k  [0603]  48.51,86.11 180 top
R85  47k  [0603]  48.51,84.2 180 top
R86  10k  [0603]  48.51,82.3 180 top
R87  47k  [0603]  48.51,80.39 180 top
R88  10k  [0603]  59.94,70.87 270 top
R89  10k  [0603]  38.35,103.25 0 top
R90  100  [0603]  48.51,101.98 0 top
R91  4.7k  [0603]  112.27,105.79 0 top
R92  4.7k  [0603]  112.27,108.33 0 top
R93  5.1k  [0603]  104.65,108.46 270 top
R94  5.1k  [0603]  92.84,113.92 0 top
R95  10k  [0603]  130.05,103.89 270 top
R96  10k  [0603]  124.97,103.89 90 top
R97  10k  [0603]  142.75,103.89 0 top
R98  4.7k  [0603]  112.27,110.87 0 top
R99  2.2k  [0603]  146.56,108.97 180 top
R100  2.2k  [0603]  142.75,108.97 0 top
R101  715  [0603]  103.38,100.08 270 top
R102  240  [0603]  105.92,100.08 90 top
R103  10k  [0603]  122.43,99.44 180 top
R104  47k  [0603]  122.43,97.54 180 top
R105  10k  [0603]  122.43,93.73 180 top
R106  10k  [0603]  122.43,95.63 0 top
R107  10k  [0603]  122.43,91.82 0 top
R108  10k  [0603]  122.43,78.49 180 top
R109  47k  [0603]  126.24,78.49 180 top
R110  10k  [0603]  122.43,89.92 180 top
R111  47k  [0603]  122.43,88.01 180 top
R112  1k  [0603]  112.27,100.71 180 top
R113  2.0k  [0603]  100.84,67.06 180 top
R114  10k  [0603]  122.43,86.11 180 top
R115  47k  [0603]  122.43,84.2 180 top
R116  10k  [0603]  122.43,82.3 180 top
R117  47k  [0603]  122.43,80.39 180 top
R118  10k  [0603]  133.86,70.87 270 top
R119  10k  [0603]  112.27,103.25 0 top
R120  100  [0603]  122.43,101.98 0 top
S1  Reset  [TACTILE_SWITCH_SMD_5.2MM]  20.57,60.96 90 top
S2  GPIO0  [TACTILE_SWITCH_SMD_5.2MM]  62.48,50.04 0 top
S3  Reset  [TACTILE_SWITCH_SMD_5.2MM]  94.49,60.96 90 top
S4  GPIO0  [TACTILE_SWITCH_SMD_5.2MM]  136.4,50.04 0 top
S5  Reset  [TACTILE_SWITCH_SMD_5.2MM]  20.57,119.89 90 top
S6  GPIO0  [TACTILE_SWITCH_SMD_5.2MM]  62.48,108.97 0 top
S7  Reset  [TACTILE_SWITCH_SMD_5.2MM]  94.49,119.89 90 top
S8  GPIO0  [TACTILE_SWITCH_SMD_5.2MM]  136.4,108.97 0 top
TP1  TEST-POINT3  [PAD.03X.03]  62.48,50.04 0 bottom
TP2  TEST-POINT3  [PAD.03X.03]  136.4,50.04 0 bottom
TP3  TEST-POINT3  [PAD.03X.03]  62.48,108.97 0 bottom
TP4  TEST-POINT3  [PAD.03X.03]  136.4,108.97 0 bottom
U1  ESP-WROOM-3232D-NARROW  [ESP-WROOM-32D-NARROW]  66.29,30.99 0 top
U2  CH340C  [SO016]  24.38,48.77 270 top
U3  LM1117  [SOT223]  33.27,32.26 270 top
U4  3.3V  [SOT23-5]  16.76,8.89 270 top
U5  MCP73831  [SOT23-5]  25.65,17.02 0 top
U6  MAX17048  [DFN-8]  29.46,17.02 0 top
U7  CH340C  [SO016]  98.3,48.77 270 top
U8  ESP-WROOM-3232D-NARROW  [ESP-WROOM-32D-NARROW]  140.21,30.99 0 top
U9  LM1117  [SOT223]  107.19,32.26 270 top
U10  3.3V  [SOT23-5]  90.68,8.89 270 top
U11  MCP73831  [SOT23-5]  99.57,17.02 0 top
U12  MAX17048  [DFN-8]  103.38,17.02 0 top
U13  CH340C  [SO016]  24.38,107.7 270 top
U14  ESP-WROOM-3232D-NARROW  [ESP-WROOM-32D-NARROW]  66.29,89.92 0 top
U15  LM1117  [SOT223]  33.27,91.19 270 top
U16  3.3V  [SOT23-5]  16.76,67.82 270 top
U17  MCP73831  [SOT23-5]  25.65,75.95 0 top
U18  MAX17048  [DFN-8]  29.46,75.95 0 top
U19  CH340C  [SO016]  98.3,107.7 270 top
U20  ESP-WROOM-3232D-NARROW  [ESP-WROOM-32D-NARROW]  140.21,89.92 0 top
U21  LM1117  [SOT223]  107.19,91.19 270 top
U22  3.3V  [SOT23-5]  90.68,67.82 270 top
U23  MCP73831  [SOT23-5]  99.57,75.95 0 top
U24  MAX17048  [DFN-8]  103.38,75.95 0 top
U$1  [V323252]  88.27,51.43 0 bottom
U$2  [#SCL#34]  104.39,57.78 90 top
U$3  [#SCL#34]  30.48,57.78 90 top
U$4  [#SDA#33]  33.02,57.78 90 top
U$5  [#3#3V#33]  35.56,57.78 90 top
U$6  [#GND#32]  38.1,57.78 90 top
U$7  [#SCK#31]  40.64,57.78 90 top
U$8  [#POCI#30]  43.18,57.78 90 top
U$9  [#PICO#29]  45.72,57.78 90 top
U$10  [1836]  45.09,51.94 0 top
U$11  [##CS##28]  48.26,57.78 90 top
U$12  [#27#27]  50.8,57.78 90 top
U$13  [#26#26]  53.34,57.78 90 top
U$14  [TX1838]  45.09,49.4 0 top
U$15  [RX1839]  45.09,46.86 0 top
U$16  [PWR1837]  45.09,44.32 0 top
U$17  [CHG1840]  45.09,41.78 0 top
U$18  [#25#18]  57.4,57.78 90 top
U$19  [#17#17]  59.94,57.78 90 top
U$20  [#16#15]  62.48,57.78 90 top
U$21  [#14#14]  65.02,57.78 90 top
U$22  [#13#5]  67.56,57.78 90 top
U$23  [#4#2]  70.1,57.78 90 top
U$24  [#TX#O#0]  72.64,57.78 90 top
U$25  [#RX#I#1]  75.18,57.78 90 top
U$26  [#RESET#1842]  20.57,56.51 0 top
U$27  [#BOOT#1841]  62.48,53.47 0 top
U$28  [#JTAG#1847]  63.12,41.78 0 top
U$29  [#A0#1843]  75.18,14.35 90 top
U$30  [#A3#1843]  72.64,14.35 90 top
U$31  [#A6#1843]  70.1,14.35 90 top
U$32  [#A7#1843]  67.56,14.35 90 top
U$33  [#A4#1843]  65.02,14.35 90 top
U$34  [#A5#1843]  62.48,14.35 90 top
U$35  [#VIN#1843]  57.4,14.35 90 top
U$36  [#GND#1844]  54.86,14.35 90 top
U$37  [#GND#1844]  52.32,14.35 90 top
U$38  [#5V#1845]  49.78,14.35 90 top
U$39  [#3#3V#1845]  47.24,14.35 90 top
U$40  [##RST##1845]  44.7,14.35 90 top
U$41  [#REF#1846]  42.16,14.35 90 top
U$42  [#MEAS#1851]  51.56,49.4 0 top
U$43  [#1849]  32.26,17.4 0 top
U$44  [#1850]  34.8,17.4 0 top
U$45  [#BATT#1848]  33.27,21.72 0 bottom
U$46  [#JTAG#1847]  63.12,41.78 0 bottom
U$47  [#IOT#132321874]  37.85,39.5 0 bottom
U$48  [ESP321855]  52.32,23.62 90 top
U$49  [7#15V32321861]  23.11,10.67 90 top
U$50  [#39#A3#321862]  72.64,8.64 90 bottom
U$51  [#36#A0#321862]  75.18,8.64 90 bottom
U$52  [#34#A6#32321865]  65.02,8.64 90 bottom
U$53  [#35#A7#321862]  67.56,8.64 90 bottom
U$54  [#32#A4#32321865]  62.48,8.64 90 bottom
U$55  [#34#A6#321862]  70.1,8.64 90 bottom
U$56  [#VIN#321862]  57.4,8.64 90 bottom
U$57  [#GND#321863]  54.86,8.64 90 bottom
U$58  [#5V#321864]  49.78,8.64 90 bottom
U$59  [#3#3V#321864]  47.24,8.64 90 bottom
U$60  [#GND#321863]  52.32,8.64 90 bottom
U$61  [##RESET##321864]  44.7,8.64 90 bottom
U$62  [#IOREF#321865]  42.16,8.64 90 bottom
U$63  [#3#RX#I#32321869]  75.18,63.5 90 bottom
U$64  [#1#TX#O#32321869]  72.64,63.5 90 bottom
U$65  [##ALERT##4#321866]  70.1,63.37 90 bottom
U$66  [#13#TCK#32321869]  67.56,63.5 90 bottom
U$67  [#14#TMS#32321869]  65.02,63.5 90 bottom
U$68  [#16#32321869]  62.48,63.5 90 bottom
U$69  [#17#32321869]  59.94,63.5 90 bottom
U$70  [#25#32321869]  57.4,63.5 90 bottom
U$71  [#26#32321869]  53.34,63.5 90 bottom
U$72  [#5##CS##32321869]  48.26,63.5 90 bottom
U$73  [#23#PICO#321866]  45.72,63.5 90 bottom
U$74  [#19#POCI#321866]  43.18,63.5 90 bottom
U$75  [#18#SCK#32321869]  40.64,63.5 90 bottom
U$76  [#21#SDA#32321869]  33.02,63.5 90 bottom
U$77  [#22#SCL#32321869]  30.48,63.5 90 bottom
U$78  [#27#32321869]  50.8,63.5 90 bottom
U$79  [#GND#321866]  38.1,63.5 90 bottom
U$80  [#3#3V#321866]  35.56,63.5 90 bottom
U$81  [#MEAS#1851]  51.82,53.21 0 bottom
U$82  [#BYP#35]  16.38,56.39 90 bottom
U$83  [D#32321863]  14.48,49.66 0 bottom
U$84  [D#32321862]  14.35,47.88 0 bottom
U$85  [G32321864]  14.35,46.1 0 bottom
U$86  [#1849]  32,17.4 0 bottom
U$87  [V323252]  14.35,51.43 0 bottom
U$88  [#1850]  34.54,17.4 0 bottom
U$89  [#I2C#1855]  72.64,50.16 90 bottom
U$90  [##ALERT##1852]  70.1,51.43 90 bottom
U$91  [#TMS#1854]  65.02,51.31 90 bottom
U$92  [#TCK#1853]  67.56,51.31 90 bottom
U$93  [ESP32321856]  51.69,28.32 0 bottom
U$94  [MADE_IN32321857]  45.97,23.37 0 bottom
U$95  [TP1321868]  62.48,52.07 90 bottom
U$96  [INPUT_ONLY321867]  71.37,19.3 0 top
U$97  [INPUT_ONLY321867]  71.37,17.78 0 bottom
U$98  [REDBOARD_LOGO]  57.4,29.72 0 bottom
U$99  [THE_USA32321858]  45.97,20.83 0 bottom
U$100  [#IOT#132321869]  52.32,34.8 90 top
U$101  [7#15V32321861]  16,18.03 90 bottom
U$102  [#SDA#33]  106.93,57.78 90 top
U$103  [3#3V_LOGIC_SHIELDS_ONLY132321876]  45.97,25.4 0 bottom
U$104  [#3#3V#33]  109.47,57.78 90 top
U$105  [#GND#32]  112.01,57.78 90 top
U$106  [#SCK#31]  114.55,57.78 90 top
U$107  [#POCI#30]  117.09,57.78 90 top
U$108  [#PICO#29]  119.63,57.78 90 top
U$109  [1836]  119,51.94 0 top
U$110  [##CS##28]  122.17,57.78 90 top
U$111  [#27#27]  124.71,57.78 90 top
U$112  [#26#26]  127.25,57.78 90 top
U$113  [TX1838]  119,49.4 0 top
U$114  [RX1839]  119,46.86 0 top
U$115  [PWR1837]  119,44.32 0 top
U$116  [CHG1840]  119,41.78 0 top
U$117  [#25#18]  131.32,57.78 90 top
U$118  [#17#17]  133.86,57.78 90 top
U$119  [#16#15]  136.4,57.78 90 top
U$120  [#14#14]  138.94,57.78 90 top
U$121  [#13#5]  141.48,57.78 90 top
U$122  [#4#2]  144.02,57.78 90 top
U$123  [#TX#O#0]  146.56,57.78 90 top
U$124  [#RX#I#1]  149.1,57.78 90 top
U$125  [#RESET#1842]  94.49,56.51 0 top
U$126  [#BOOT#1841]  136.4,53.47 0 top
U$127  [#JTAG#1847]  137.03,41.78 0 top
U$128  [#A0#1843]  149.1,14.35 90 top
U$129  [#A3#1843]  146.56,14.35 90 top
U$130  [#A6#1843]  144.02,14.35 90 top
U$131  [#A7#1843]  141.48,14.35 90 top
U$132  [#A4#1843]  138.94,14.35 90 top
U$133  [#A5#1843]  136.4,14.35 90 top
U$134  [#VIN#1843]  131.32,14.35 90 top
U$135  [#GND#1844]  128.78,14.35 90 top
U$136  [#GND#1844]  126.24,14.35 90 top
U$137  [#5V#1845]  123.7,14.35 90 top
U$138  [#3#3V#1845]  121.16,14.35 90 top
U$139  [##RST##1845]  118.62,14.35 90 top
U$140  [#REF#1846]  116.08,14.35 90 top
U$141  [#MEAS#1851]  125.48,49.4 0 top
U$142  [#1849]  106.17,17.4 0 top
U$143  [#1850]  108.71,17.4 0 top
U$144  [#BATT#1848]  107.19,21.72 0 bottom
U$145  [#JTAG#1847]  137.03,41.78 0 bottom
U$146  [ESP321855]  126.24,23.62 90 top
U$147  [7#15V32321861]  97.03,10.67 90 top
U$148  [#39#A3#321862]  146.56,8.64 90 bottom
U$149  [#36#A0#321862]  149.1,8.64 90 bottom
U$150  [#34#A6#32321865]  138.94,8.64 90 bottom
U$151  [#35#A7#321862]  141.48,8.64 90 bottom
U$152  [#32#A4#32321865]  136.4,8.64 90 bottom
U$153  [#34#A6#321862]  144.02,8.64 90 bottom
U$154  [#VIN#321862]  131.32,8.64 90 bottom
U$155  [#GND#321863]  128.78,8.64 90 bottom
U$156  [#5V#321864]  123.7,8.64 90 bottom
U$157  [#3#3V#321864]  121.16,8.64 90 bottom
U$158  [#GND#321863]  126.24,8.64 90 bottom
U$159  [##RESET##321864]  118.62,8.64 90 bottom
U$160  [#IOREF#321865]  116.08,8.64 90 bottom
U$161  [#3#RX#I#32321869]  149.1,63.5 90 bottom
U$162  [#1#TX#O#32321869]  146.56,63.5 90 bottom
U$163  [#13#TCK#32321869]  141.48,63.5 90 bottom
U$164  [#14#TMS#32321869]  138.94,63.5 90 bottom
U$165  [#16#32321869]  136.4,63.5 90 bottom
U$166  [#17#32321869]  133.86,63.5 90 bottom
U$167  [#25#32321869]  131.32,63.5 90 bottom
U$168  [#26#32321869]  127.25,63.5 90 bottom
U$169  [#5##CS##32321869]  122.17,63.5 90 bottom
U$170  [#23#PICO#321866]  119.63,63.5 90 bottom
U$171  [#19#POCI#321866]  117.09,63.5 90 bottom
U$172  [#18#SCK#32321869]  114.55,63.5 90 bottom
U$173  [#21#SDA#32321869]  106.93,63.5 90 bottom
U$174  [#22#SCL#32321869]  104.39,63.5 90 bottom
U$175  [#27#32321869]  124.71,63.5 90 bottom
U$176  [#GND#321866]  112.01,63.5 90 bottom
U$177  [#3#3V#321866]  109.47,63.5 90 bottom
U$178  [#MEAS#1851]  125.73,53.21 0 bottom
U$179  [#BYP#35]  90.3,56.39 90 bottom
U$180  [D#32321863]  88.39,49.66 0 bottom
U$181  [D#32321862]  88.27,47.88 0 bottom
U$182  [G32321864]  88.27,46.1 0 bottom
U$183  [#1849]  105.92,17.4 0 bottom
U$184  [#1850]  108.46,17.4 0 bottom
U$185  [#I2C#1855]  146.56,50.16 90 bottom
U$186  [##ALERT##1852]  144.02,51.43 90 bottom
U$187  [#TMS#1854]  138.94,51.31 90 bottom
U$188  [#TCK#1853]  141.48,51.31 90 bottom
U$189  [INPUT_ONLY321867]  145.29,19.3 0 top
U$190  [INPUT_ONLY321867]  145.29,17.78 0 bottom
U$191  [##ALERT##4#321866]  144.02,63.37 90 bottom
U$192  [TP1321868]  136.4,52.07 90 bottom
U$193  [REDBOARD_LOGO]  131.32,29.72 0 bottom
U$194  [#IOT#132321869]  126.24,34.8 90 top
U$195  [ESP32321856]  125.6,28.32 0 bottom
U$196  [#IOT#132321874]  111.76,39.5 0 bottom
U$197  [MADE_IN32321857]  119.89,23.37 0 bottom
U$198  [THE_USA32321858]  119.89,20.83 0 bottom
U$199  [7#15V32321861]  89.92,18.03 90 bottom
U$200  [3#3V_LOGIC_SHIELDS_ONLY132321876]  119.89,25.4 0 bottom
U$201  [V323252]  14.35,110.36 0 bottom
U$202  [#SCL#34]  30.48,116.71 90 top
U$203  [#SDA#33]  33.02,116.71 90 top
U$204  [#3#3V#33]  35.56,116.71 90 top
U$205  [#GND#32]  38.1,116.71 90 top
U$206  [#SCK#31]  40.64,116.71 90 top
U$207  [#POCI#30]  43.18,116.71 90 top
U$208  [#PICO#29]  45.72,116.71 90 top
U$209  [1836]  45.09,110.87 0 top
U$210  [##CS##28]  48.26,116.71 90 top
U$211  [#27#27]  50.8,116.71 90 top
U$212  [#26#26]  53.34,116.71 90 top
U$213  [TX1838]  45.09,108.33 0 top
U$214  [RX1839]  45.09,105.79 0 top
U$215  [PWR1837]  45.09,103.25 0 top
U$216  [CHG1840]  45.09,100.71 0 top
U$217  [#25#18]  57.4,116.71 90 top
U$218  [#17#17]  59.94,116.71 90 top
U$219  [#16#15]  62.48,116.71 90 top
U$220  [#14#14]  65.02,116.71 90 top
U$221  [#13#5]  67.56,116.71 90 top
U$222  [#4#2]  70.1,116.71 90 top
U$223  [#TX#O#0]  72.64,116.71 90 top
U$224  [#RX#I#1]  75.18,116.71 90 top
U$225  [#RESET#1842]  20.57,115.44 0 top
U$226  [#BOOT#1841]  62.48,112.4 0 top
U$227  [#JTAG#1847]  63.12,100.71 0 top
U$228  [#A0#1843]  75.18,73.28 90 top
U$229  [#A3#1843]  72.64,73.28 90 top
U$230  [#A6#1843]  70.1,73.28 90 top
U$231  [#A7#1843]  67.56,73.28 90 top
U$232  [#A4#1843]  65.02,73.28 90 top
U$233  [#A5#1843]  62.48,73.28 90 top
U$234  [#VIN#1843]  57.4,73.28 90 top
U$235  [#GND#1844]  54.86,73.28 90 top
U$236  [#GND#1844]  52.32,73.28 90 top
U$237  [#5V#1845]  49.78,73.28 90 top
U$238  [#3#3V#1845]  47.24,73.28 90 top
U$239  [##RST##1845]  44.7,73.28 90 top
U$240  [#REF#1846]  42.16,73.28 90 top
U$241  [#MEAS#1851]  51.56,108.33 0 top
U$242  [#1849]  32.26,76.33 0 top
U$243  [#1850]  34.8,76.33 0 top
U$244  [#BATT#1848]  33.27,80.65 0 bottom
U$245  [#JTAG#1847]  63.12,100.71 0 bottom
U$246  [ESP321855]  52.32,82.55 90 top
U$247  [7#15V32321861]  23.11,69.6 90 top
U$248  [#39#A3#321862]  72.64,67.56 90 bottom
U$249  [#36#A0#321862]  75.18,67.56 90 bottom
U$250  [#34#A6#32321865]  65.02,67.56 90 bottom
U$251  [#35#A7#321862]  67.56,67.56 90 bottom
U$252  [#32#A4#32321865]  62.48,67.56 90 bottom
U$253  [#34#A6#321862]  70.1,67.56 90 bottom
U$254  [#VIN#321862]  57.4,67.56 90 bottom
U$255  [#GND#321863]  54.86,67.56 90 bottom
U$256  [#5V#321864]  49.78,67.56 90 bottom
U$257  [#3#3V#321864]  47.24,67.56 90 bottom
U$258  [#GND#321863]  52.32,67.56 90 bottom
U$259  [##RESET##321864]  44.7,67.56 90 bottom
U$260  [#IOREF#321865]  42.16,67.56 90 bottom
U$261  [#3#RX#I#32321869]  75.18,122.43 90 bottom
U$262  [#1#TX#O#32321869]  72.64,122.43 90 bottom
U$263  [#13#TCK#32321869]  67.56,122.43 90 bottom
U$264  [#14#TMS#32321869]  65.02,122.43 90 bottom
U$265  [#16#32321869]  62.48,122.43 90 bottom
U$266  [#17#32321869]  59.94,122.43 90 bottom
U$267  [#25#32321869]  57.4,122.43 90 bottom
U$268  [#26#32321869]  53.34,122.43 90 bottom
U$269  [#5##CS##32321869]  48.26,122.43 90 bottom
U$270  [#23#PICO#321866]  45.72,122.43 90 bottom
U$271  [#19#POCI#321866]  43.18,122.43 90 bottom
U$272  [#18#SCK#32321869]  40.64,122.43 90 bottom
U$273  [#21#SDA#32321869]  33.02,122.43 90 bottom
U$274  [#22#SCL#32321869]  30.48,122.43 90 bottom
U$275  [#27#32321869]  50.8,122.43 90 bottom
U$276  [#GND#321866]  38.1,122.43 90 bottom
U$277  [#3#3V#321866]  35.56,122.43 90 bottom
U$278  [#MEAS#1851]  51.82,112.14 0 bottom
U$279  [#BYP#35]  16.38,115.32 90 bottom
U$280  [D#32321863]  14.48,108.59 0 bottom
U$281  [D#32321862]  14.35,106.81 0 bottom
U$282  [G32321864]  14.35,105.03 0 bottom
U$283  [#1849]  32,76.33 0 bottom
U$284  [#1850]  34.54,76.33 0 bottom
U$285  [#I2C#1855]  72.64,109.09 90 bottom
U$286  [##ALERT##1852]  70.1,110.36 90 bottom
U$287  [#TMS#1854]  65.02,110.24 90 bottom
U$288  [#TCK#1853]  67.56,110.24 90 bottom
U$289  [INPUT_ONLY321867]  71.37,78.23 0 top
U$290  [INPUT_ONLY321867]  71.37,76.71 0 bottom
U$291  [##ALERT##4#321866]  70.1,122.3 90 bottom
U$292  [TP1321868]  62.48,111 90 bottom
U$293  [REDBOARD_LOGO]  57.4,88.65 0 bottom
U$294  [#IOT#132321869]  52.32,93.73 90 top
U$295  [ESP32321856]  51.69,87.25 0 bottom
U$296  [#IOT#132321874]  37.85,98.42 0 bottom
U$297  [MADE_IN32321857]  45.97,82.3 0 bottom
U$298  [THE_USA32321858]  45.97,79.76 0 bottom
U$299  [7#15V32321861]  16,76.96 90 bottom
U$300  [3#3V_LOGIC_SHIELDS_ONLY132321876]  45.97,84.33 0 bottom
U$301  [V323252]  88.27,110.36 0 bottom
U$302  [#SCL#34]  104.39,116.71 90 top
U$303  [#SDA#33]  106.93,116.71 90 top
U$304  [#3#3V#33]  109.47,116.71 90 top
U$305  [#GND#32]  112.01,116.71 90 top
U$306  [#SCK#31]  114.55,116.71 90 top
U$307  [#POCI#30]  117.09,116.71 90 top
U$308  [#PICO#29]  119.63,116.71 90 top
U$309  [1836]  119,110.87 0 top
U$310  [##CS##28]  122.17,116.71 90 top
U$311  [#27#27]  124.71,116.71 90 top
U$312  [#26#26]  127.25,116.71 90 top
U$313  [TX1838]  119,108.33 0 top
U$314  [RX1839]  119,105.79 0 top
U$315  [PWR1837]  119,103.25 0 top
U$316  [CHG1840]  119,100.71 0 top
U$317  [#25#18]  131.32,116.71 90 top
U$318  [#17#17]  133.86,116.71 90 top
U$319  [#16#15]  136.4,116.71 90 top
U$320  [#14#14]  138.94,116.71 90 top
U$321  [#13#5]  141.48,116.71 90 top
U$322  [#4#2]  144.02,116.71 90 top
U$323  [#TX#O#0]  146.56,116.71 90 top
U$324  [#RX#I#1]  149.1,116.71 90 top
U$325  [#RESET#1842]  94.49,115.44 0 top
U$326  [#BOOT#1841]  136.4,112.4 0 top
U$327  [#JTAG#1847]  137.03,100.71 0 top
U$328  [#A0#1843]  149.1,73.28 90 top
U$329  [#A3#1843]  146.56,73.28 90 top
U$330  [#A6#1843]  144.02,73.28 90 top
U$331  [#A7#1843]  141.48,73.28 90 top
U$332  [#A4#1843]  138.94,73.28 90 top
U$333  [#A5#1843]  136.4,73.28 90 top
U$334  [#VIN#1843]  131.32,73.28 90 top
U$335  [#GND#1844]  128.78,73.28 90 top
U$336  [#GND#1844]  126.24,73.28 90 top
U$337  [#5V#1845]  123.7,73.28 90 top
U$338  [#3#3V#1845]  121.16,73.28 90 top
U$339  [##RST##1845]  118.62,73.28 90 top
U$340  [#REF#1846]  116.08,73.28 90 top
U$341  [#MEAS#1851]  125.48,108.33 0 top
U$342  [#1849]  106.17,76.33 0 top
U$343  [#1850]  108.71,76.33 0 top
U$344  [#BATT#1848]  107.19,80.65 0 bottom
U$345  [#JTAG#1847]  137.03,100.71 0 bottom
U$346  [ESP321855]  126.24,82.55 90 top
U$347  [7#15V32321861]  97.03,69.6 90 top
U$348  [#39#A3#321862]  146.56,67.56 90 bottom
U$349  [#36#A0#321862]  149.1,67.56 90 bottom
U$350  [#34#A6#32321865]  138.94,67.56 90 bottom
U$351  [#35#A7#321862]  141.48,67.56 90 bottom
U$352  [#32#A4#32321865]  136.4,67.56 90 bottom
U$353  [#34#A6#321862]  144.02,67.56 90 bottom
U$354  [#VIN#321862]  131.32,67.56 90 bottom
U$355  [#GND#321863]  128.78,67.56 90 bottom
U$356  [#5V#321864]  123.7,67.56 90 bottom
U$357  [#3#3V#321864]  121.16,67.56 90 bottom
U$358  [#GND#321863]  126.24,67.56 90 bottom
U$359  [##RESET##321864]  118.62,67.56 90 bottom
U$360  [#IOREF#321865]  116.08,67.56 90 bottom
U$361  [#3#RX#I#32321869]  149.1,122.43 90 bottom
U$362  [#1#TX#O#32321869]  146.56,122.43 90 bottom
U$363  [#13#TCK#32321869]  141.48,122.43 90 bottom
U$364  [#14#TMS#32321869]  138.94,122.43 90 bottom
U$365  [#16#32321869]  136.4,122.43 90 bottom
U$366  [#17#32321869]  133.86,122.43 90 bottom
U$367  [#25#32321869]  131.32,122.43 90 bottom
U$368  [#26#32321869]  127.25,122.43 90 bottom
U$369  [#5##CS##32321869]  122.17,122.43 90 bottom
U$370  [#23#PICO#321866]  119.63,122.43 90 bottom
U$371  [#19#POCI#321866]  117.09,122.43 90 bottom
U$372  [#18#SCK#32321869]  114.55,122.43 90 bottom
U$373  [#21#SDA#32321869]  106.93,122.43 90 bottom
U$374  [#22#SCL#32321869]  104.39,122.43 90 bottom
U$375  [#27#32321869]  124.71,122.43 90 bottom
U$376  [#GND#321866]  112.01,122.43 90 bottom
U$377  [#3#3V#321866]  109.47,122.43 90 bottom
U$378  [#MEAS#1851]  125.73,112.14 0 bottom
U$379  [#BYP#35]  90.3,115.32 90 bottom
U$380  [D#32321863]  88.39,108.59 0 bottom
U$381  [D#32321862]  88.27,106.81 0 bottom
U$382  [G32321864]  88.27,105.03 0 bottom
U$383  [#1849]  105.92,76.33 0 bottom
U$384  [#1850]  108.46,76.33 0 bottom
U$385  [#I2C#1855]  146.56,109.09 90 bottom
U$386  [##ALERT##1852]  144.02,110.36 90 bottom
U$387  [#TMS#1854]  138.94,110.24 90 bottom
U$388  [#TCK#1853]  141.48,110.24 90 bottom
U$389  [INPUT_ONLY321867]  145.29,78.23 0 top
U$390  [INPUT_ONLY321867]  145.29,76.71 0 bottom
U$391  [##ALERT##4#321866]  144.02,122.3 90 bottom
U$392  [TP1321868]  136.4,111 90 bottom
U$393  [REDBOARD_LOGO]  131.32,88.65 0 bottom
U$394  [#IOT#132321869]  126.24,93.73 90 top
U$395  [ESP32321856]  125.6,87.25 0 bottom
U$396  [#IOT#132321874]  111.76,98.42 0 bottom
U$397  [MADE_IN32321857]  119.89,82.3 0 bottom
U$398  [THE_USA32321858]  119.89,79.76 0 bottom
U$399  [7#15V32321861]  89.92,76.96 90 bottom
U$400  [3#3V_LOGIC_SHIELDS_ONLY132321876]  119.89,84.33 0 bottom

## Library data of the parts
BYP BYP1-BYP3 JP10-JP14 JP23-JP26 JP28 JP37-JP40 JP42 JP51-JP54 JP56 = SparkFun-Jumpers
C1 C2 C4 C5 C7 C11-C13 C17-C19 C22-C24 C27 C29 C31 C34-C36 C39-C41 C44 C46 C48 C51-C53 C56-C58 C61 C63 C65 C68 = SparkFun-Capacitors; PROD_ID: CAP-00810
C3 C14 C25 C30 C42 C47 C59 C64 = SparkFun-Capacitors; PROD_ID: CAP-11015
C6 C10 C20 C26 C37 C43 C54 C60 = SparkFun-Capacitors; PROD_ID: CAP-00811
C8 C21 C38 C55 = SparkFun-Capacitors; PROD_ID: CAP-00867
C9 C28 C45 C62 = SparkFun-Capacitors; PROD_ID: CAP-08478
C15 C16 C32 C33 C49 C50 C66 C67 = SparkFun-Capacitors; PROD_ID: CAP-14106
D1 D10 D16 D22 = SparkFun-DiscreteSemi; PROD_ID: DIO-08053
D2 D5 D7 D12 D13 D18 D19 D24 = SparkFun-LED; PROD_ID: DIO-00862
D3 D8 D14 D20 = SparkFun-LED; PROD_ID: DIO-09909
D4 D11 D17 D23 = SparkFun-LED; PROD_ID: DIO-09912
D6 D9 D15 D21 = SparkFun-LED; PROD_ID: DIO-09911
E$1-E$4 JP1 JP7-JP9 JP19-JP22 JP33-JP36 JP47-JP50 LOGO1-LOGO16 U$98 U$193 U$293 U$393 = SparkFun-Aesthetics
E$5 E$6 = SparkFun-Retired
F1-F4 = SparkFun-Fuses; PROD_ID: RES-14313
J1 J30 J46 J62 = SparkFun-Connectors; PROD_ID: CONN-08106; SF_ID: PRT-12748
J2 J21 J37 J53 = SparkFun-Connectors; PROD_ID: CONN-14122
J3 J4 J14 J16 J22 J27 J31 J32 J38 J43 J47 J48 J54 J59 J63 J64 TP1-TP4 = SparkFun-Connectors
J5 J6 J17 J23 J33 J39 J49 J55 = SparkFun-Connectors; PROD_ID: CONN-11219
J7 J9 J24 J26 J40 J42 J56 J58 = SparkFun-Connectors; PROD_ID: CONN-08438
J8 J10 J18 J19 J34 J35 J50 J51 = SparkFun-Connectors; PROD_ID: CONN-10204; SF_ID: PRT-11543
J11 J25 J41 J57 = SparkFun-Connectors; PROD_ID: CONN-08437
J12 J20 J36 J52 = SparkFun-Connectors; PROD_ID: CONN-10203
J13 J28 J44 J60 = SparkFun-Connectors; PROD_ID: CONN-13694
J15 J29 J45 J61 = SparkFun-Connectors; PROD_ID: CONN-16110
JP2 JP27 JP41 JP55 = SparkFun-Connectors; PROD_ID: CONN-11443
JP3-JP6 JP15-JP18 JP29-JP32 JP43-JP46 = SparkFun-Hardware
Q1 Q2 Q14 Q17 Q27 Q30 Q40 Q43 = SparkFun-DiscreteSemi; PROD_ID: TRANS-13337
Q3 Q5 Q7 Q9 Q11 Q13 Q16 Q18 Q20 Q22 Q24 Q26 Q29 Q31 Q33 Q35 Q37 Q39 Q42 Q44 Q46 Q48 Q50 Q52 = SparkFun-DiscreteSemi; PROD_ID: TRANS-14388
Q4 Q6 Q8 Q10 Q12 Q15 Q19 Q21 Q23 Q25 Q28 Q32 Q34 Q36 Q38 Q41 Q45 Q47 Q49 Q51 = SparkFun-DiscreteSemi; PROD_ID: TRANS-14386
R1 R6-R8 R12-R15 R17 R19 R23 R24 R26 R35-R37 R43 R45-R48 R50 R54 R56 R58 R59 R65-R67 R73 R75-R78 R80 R84 R86 R88 R89 R95-R97 R103 R105-R108 R110 R114 R116 R118 R119 = SparkFun-Resistors; PROD_ID: RES-00824
R2 R3 R33 R34 R63 R64 R93 R94 = SparkFun-Resistors; PROD_ID: RES-12083
R4 R5 R9 R31 R32 R38 R61 R62 R68 R91 R92 R98 = SparkFun-Resistors; PROD_ID: RES-07857
R10 R42 R72 R102 = SparkFun-Resistors; PROD_ID: RES-07849
R11 R41 R71 R101 = SparkFun-Resistors; PROD_ID: RES-07850
R16 R18 R20 R25 R27 R44 R49 R51 R55 R57 R74 R79 R81 R85 R87 R104 R109 R111 R115 R117 = SparkFun-Resistors; PROD_ID: RES-07871
R21 R52 R82 R112 = SparkFun-Resistors; PROD_ID: RES-07856
R22 R53 R83 R113 = SparkFun-Resistors; PROD_ID: RES-08296
R28 R29 R39 R40 R69 R70 R99 R100 = SparkFun-Resistors; PROD_ID: RES-08272
R30 R60 R90 R120 = SparkFun-Resistors; PROD_ID: RES-07863
S1-S8 = SparkFun-Switches; PROD_ID: SWCH-14139
U1 U8 U14 U20 = SparkFun-RF; PROD_ID: IC-15676
U2 U7 U13 U19 = SparkFun-IC-Comms; PROD_ID: IC-14038
U3 U9 U15 U21 = SparkFun-IC-Power; PROD_ID: VREG-08170
U4 U10 U16 U22 = SparkFun-IC-Power; PROD_ID: VREG-12457
U5 U11 U17 U23 = SparkFun-IC-Power; PROD_ID: IC-09995
U6 U12 U18 U24 = SparkFun-IC-Power; PROD_ID: IC-12551
U$1-U$97 U$99-U$192 U$194-U$292 U$294-U$392 U$394-U$400 = output-ESP32